# Altium PCB LeftyBase.PcbDoc
Units mm, origin at the board's own origin, x right, y up, seen from the top; angles counter-clockwise.
Board outline 79.4 x 68 mm, 4 copper layers (Top Layer, Plane 1, Plane 2, Bottom Layer), stack 1.579 mm thick; 95 components, 41 nets, 267 pads, 182 vias.
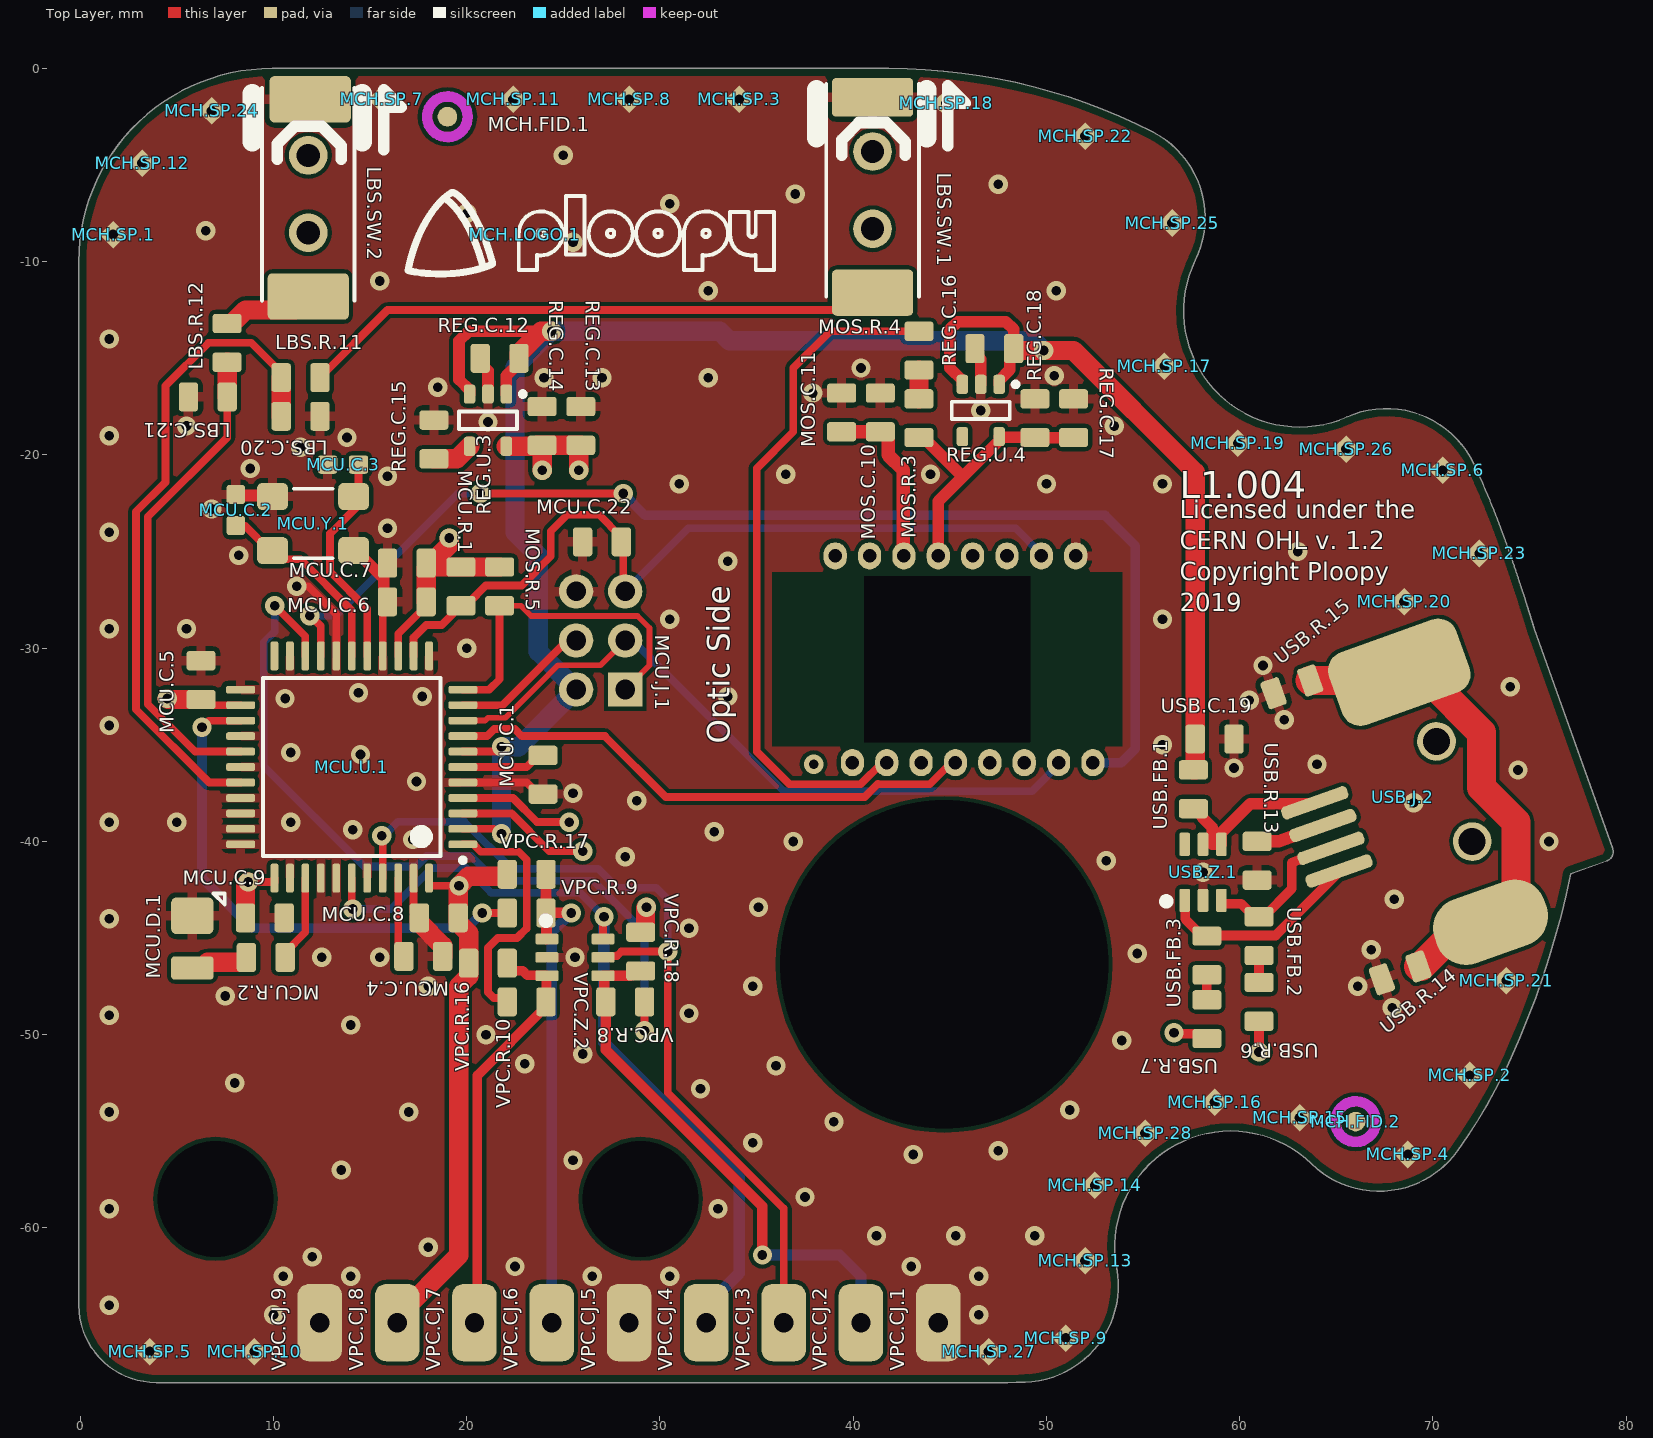
[diagram p0: Top Layer view]
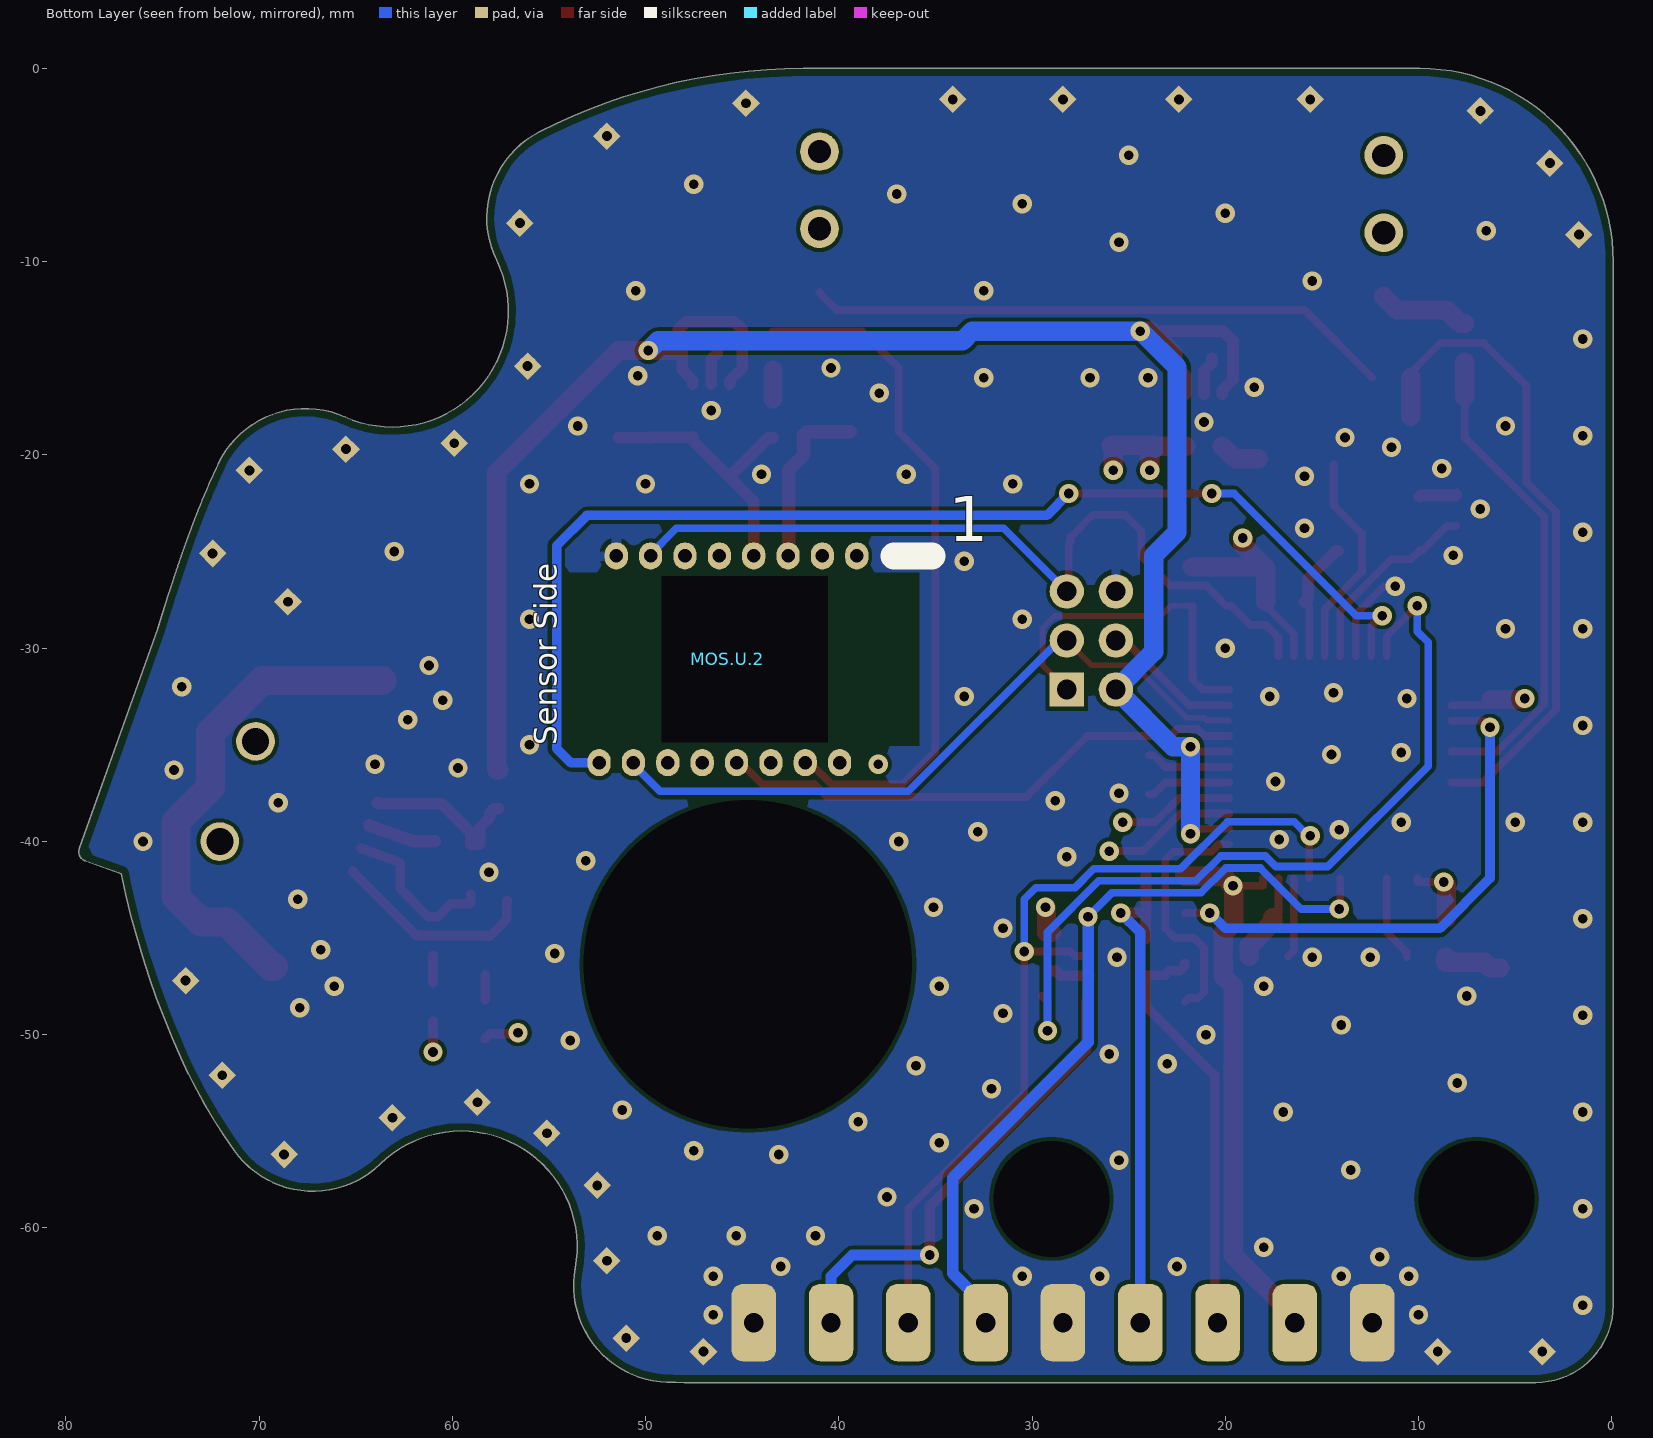
[diagram p1: Bottom Layer view, seen from below]
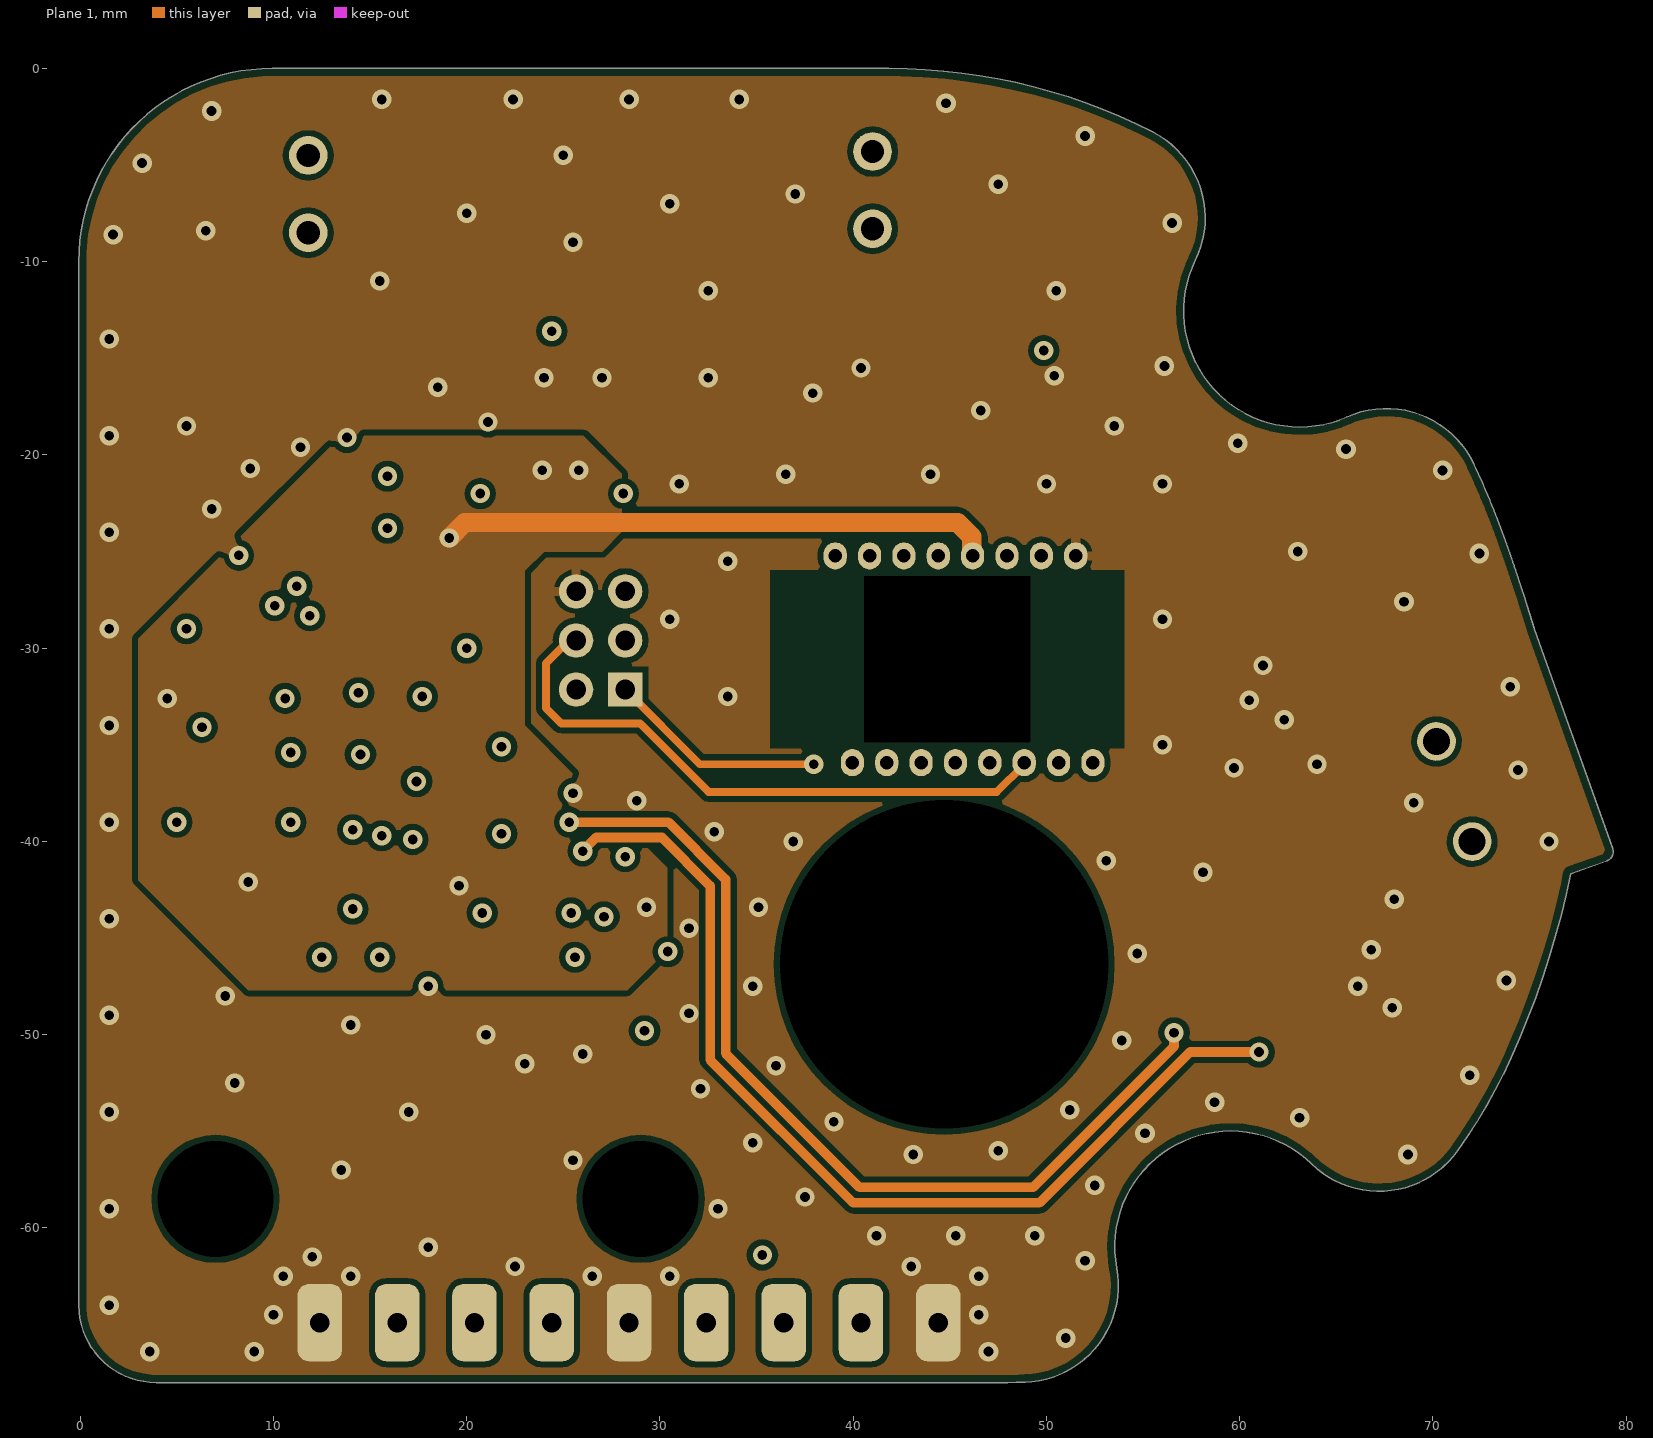
[diagram p2: Plane 1]
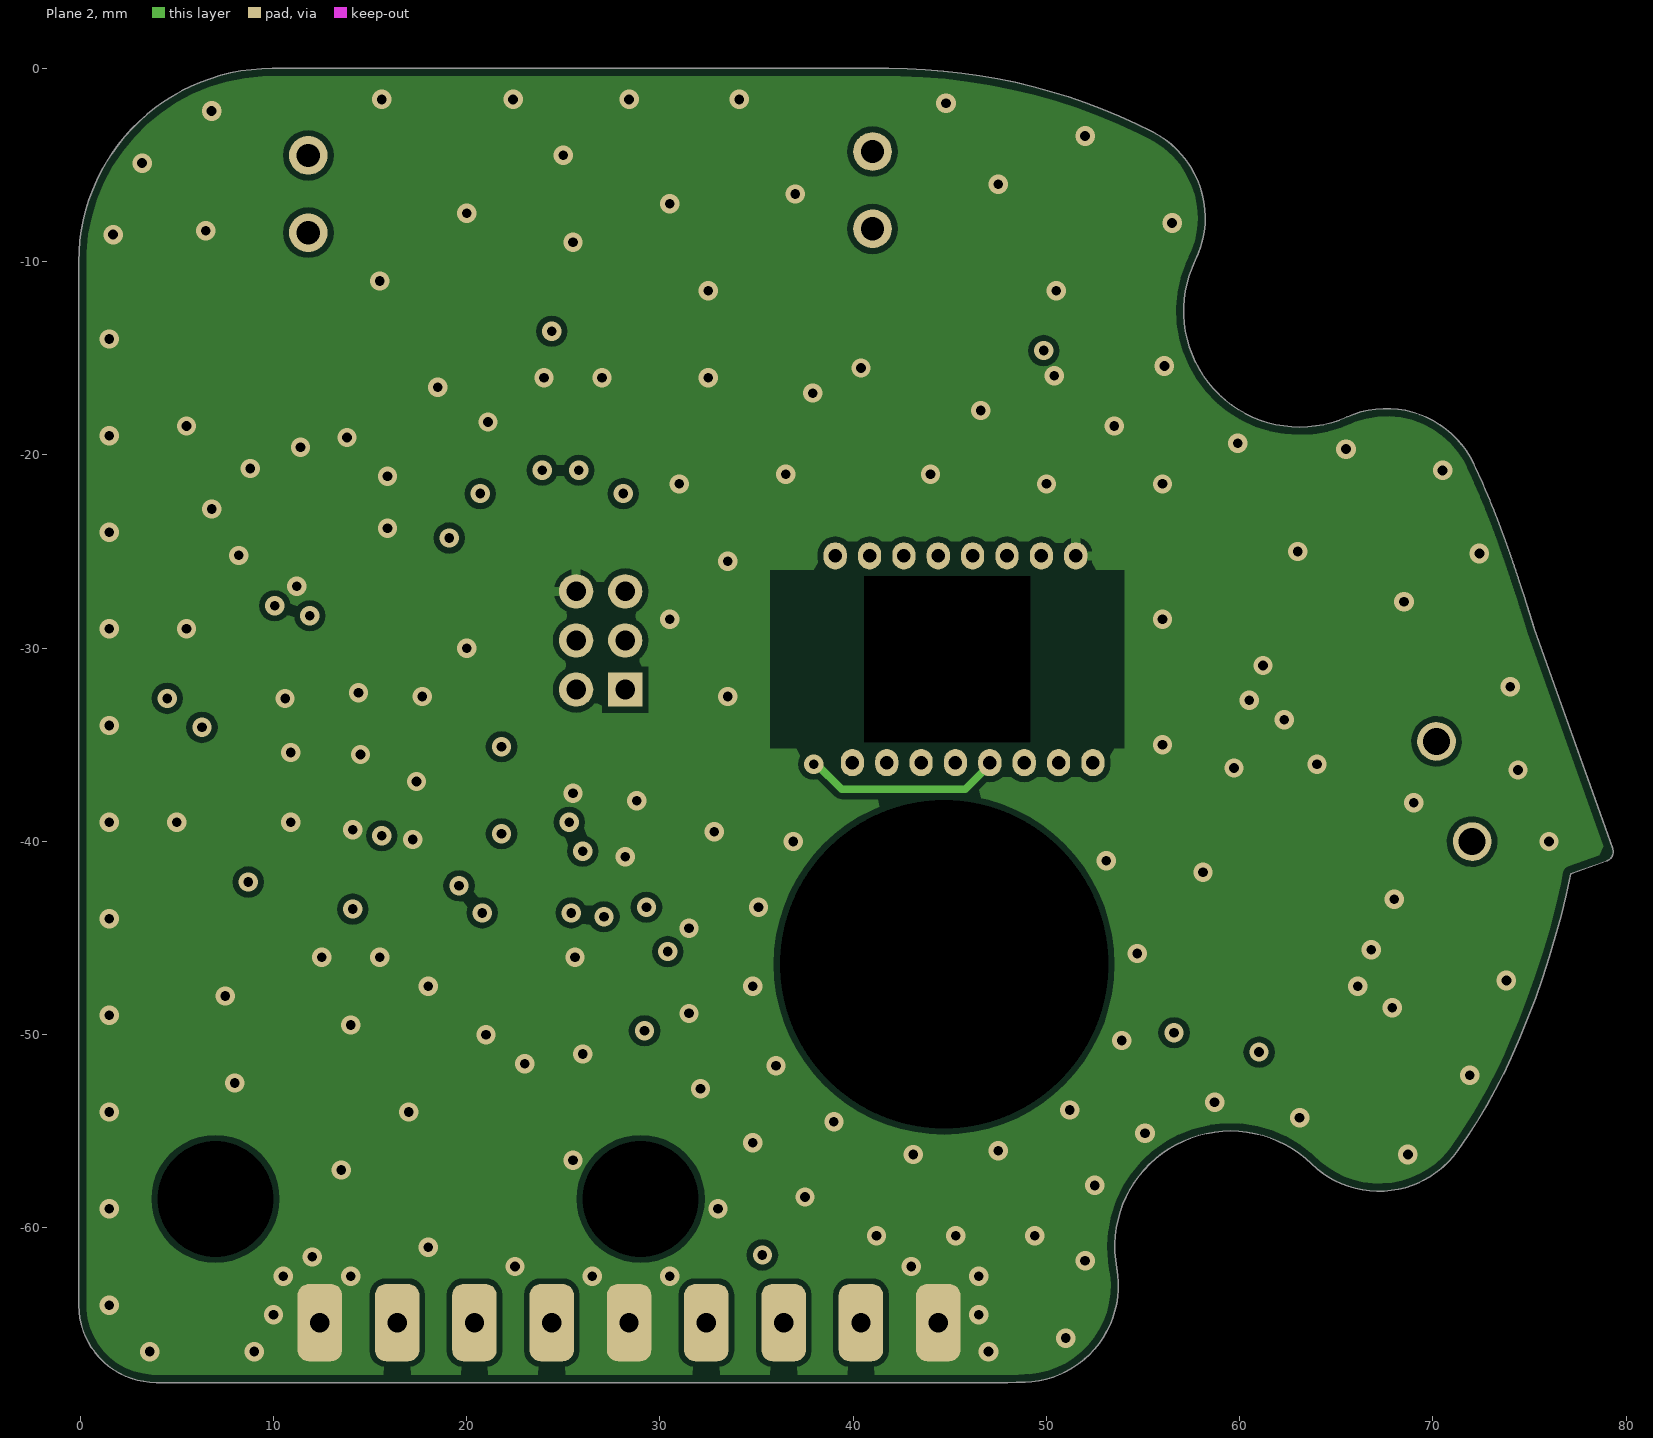
[diagram p3: Plane 2]

## Layer stack, top to bottom
Top Mask: solder mask 0.01, Solder Resist, Dk 3.5
Top Layer: signal copper 0.0356
Dielectric 1: prepreg 0.127, FR-4, Dk 4.2
Plane 1: signal copper 0.036
Dielectric 4: core 1.182, Dk 4.2
Plane 2: signal copper 0.036
Dielectric 2: prepreg 0.127, Dk 4.2
Bottom Layer: signal copper 0.0356
Bottom Solder: solder mask 0.01, Solder Resist, Dk 3.5

## Board outline
365 vertices, not listed, extent -0.073,-68 79.324,0

## Design rules (kind name [scope] priority, off if disabled: settings)
BoardOutlineClearance [(Not HasFootprint('SPARKGAP'))] p1: gap=0.4 ignorepadtopadclearanceinfootprint=FALSE
Clearance "HighV Pads" [(InNetClass('HighV') AND (IsPad OR IsVia)) vs IsPad OR IsVia] p1: gap=0.4 ignorepadtopadclearanceinfootprint=FALSE except(0: Arc-Hole Track-Hole SMDPad-Hole THPad-Hole Via-Hole Fill-Hole Poly-Hole Region-Hole Text-Hole) // Establishes minimum clearance between bare pads that are high voltage, per IPC2221A Table 6-1, 51-100V, condition A6
Clearance Inter-Pad [IsPad vs IsPad] p2: gap=0.2 ignorepadtopadclearanceinfootprint=FALSE except(0: Arc-Hole Track-Hole SMDPad-Hole THPad-Hole Via-Hole Fill-Hole Poly-Hole Region-Hole Text-Hole)
Clearance "Spark Gaps" [InNetClass('Spark Gap') vs InNet('GND') And InPoly] p3: gap=0.635 ignorepadtopadclearanceinfootprint=FALSE except(0: Arc-Hole Track-Hole SMDPad-Hole THPad-Hole Via-Hole Fill-Hole Poly-Hole Region-Hole Text-Hole)
Clearance FIDs [Name like 'FID*'] p4: gap=1.016 ignorepadtopadclearanceinfootprint=FALSE except(0: Arc-Hole Track-Hole SMDPad-Hole THPad-Hole Via-Hole Fill-Hole Poly-Hole Region-Hole Text-Hole)
Clearance "Inner Planes" [InPoly AND OnMid] p5: gap=0.3 ignorepadtopadclearanceinfootprint=FALSE except(0: Arc-Hole Track-Hole SMDPad-Hole THPad-Hole Via-Hole Fill-Hole Poly-Hole Region-Hole Text-Hole) // Defines a larger clearance for planes on inner layers.
Clearance "All Planes" [InPoly] p6: gap=0.2 ignorepadtopadclearanceinfootprint=FALSE except(0: Arc-Hole Track-Hole SMDPad-Hole THPad-Hole Via-Hole Fill-Hole Poly-Hole Region-Hole Text-Hole) // Defines minimum clearance between planes on the same layer.
Clearance "Inner Layer Clearance" [OnMid vs OnMid] p7: gap=0.3 ignorepadtopadclearanceinfootprint=FALSE except(0: Arc-Hole Track-Hole SMDPad-Hole THPad-Hole Via-Hole Fill-Hole Poly-Hole Region-Hole Text-Hole) // We will give inner layers more spacing because they tend to be subject to stricter process limits.
Clearance [All] p8: gap=0.22 ignorepadtopadclearanceinfootprint=FALSE except(0: Arc-Hole Track-Hole SMDPad-Hole THPad-Hole Via-Hole Fill-Hole Poly-Hole Region-Hole Text-Hole) // 2 oz (70um) boards require at least 10mil spacing. We give a bit more to make sure things work well.
ComponentClearance "Terminal Block" [(HasFootprint('Phoenix 1933189 - Header')) vs (HasFootprint('Phoenix 1933189 - Header'))] p1: gap=-2.286 collisioncheckmode=3 verticalgap=0.254 showdistances=FALSE
ComponentClearance "FET/TP self Clearance" [(Name like 'Q*') Or (Name like 'TP*') vs (Name like 'Q*') Or (Name like 'TP*')] p2: gap=0.254 collisioncheckmode=3 verticalgap=0.254 showdistances=FALSE
ComponentClearance [Not ((Name like 'H*') Or (Name like 'FID*') Or (Name like 'SP*')) vs Not ((Name like 'H*') Or (Name like 'FID*') Or (Name like 'SP*'))] p3: gap=0.5 collisioncheckmode=3 verticalgap=0.5 showdistances=FALSE
DiffPairsRouting [All] p1: maxlimit=0.508 minlimit=0.279 mostfreqgap=0.381 toplayer_prefgap=0.279 toplayer_minwidth=0.279 toplayer_maxwidth=0.508 toplayer_prefwidth=0.381 midlayer2_mingap=0.305 midlayer2_minwidth=0.305 midlayer2_maxwidth=0.508 midlayer2_prefwidth=0.381 midlayer3_prefgap=0.279 midlayer3_minwidth=0.279 midlayer3_maxwidth=0.508 midlayer3_prefwidth=0.381 bottomlayer_prefgap=0.279 bottomlayer_minwidth=0.279 bottomlayer_maxwidth=0.508 bottomlayer_prefwidth=0.381 maxuncoupledlength=12.7
Height [All] p1: minheight=0 maxheight=41 prefheight=12.7
HoleSize [All] p1: absolutevalues=TRUE maxlimit=100 minlimit=0.3 maxpercent=80.000 minpercent=20.000
HoleToHoleClearance [All] p1: gap=0.6 allowstackedmicrovias=TRUE
LayerPairs [All] p1: enforce=FALSE
MinimumSolderMaskSliver [All] p1: minsoldermaskwidth=0.09
NetAntennae [Not (HasFootprint('BALANCE_RESISTOR'))] p1: netantennaetolerance=0
PasteMaskExpansion [All] p1: expansion=-0.025
PlaneClearance [All] p1: clearance=0.3
PlaneConnect [All] p1: pad.planeconnectstyle=Relief pad.reliefexpansion=0.5 pad.reliefentries=4 pad.reliefconductorwidth=0.5 pad.reliefairgap=0.25 via.planeconnectstyle=Direct via.reliefexpansion=0.5 via.reliefentries=4 via.reliefconductorwidth=0.5 via.reliefairgap=0.25
PolygonConnect "PolygonConnect Spark Gap" [HasFootprint('SparkGap')] p1: connectstyle=Direct reliefconductorwidth=0.254 reliefentries=4 polygonreliefangle="90 Angle" airgapwidth=0.254 // This rule makes it so spark gaps get direct connections to ground planes.
PolygonConnect PolygonConnect_GND [All vs InNet('GND')] p2: thpad.connectstyle=Relief thpad.reliefconductorwidth=0.5 thpad.reliefentries=4 thpad.polygonreliefangle="90 Angle" thpad.airgapwidth=0.25 smdpad.connectstyle=Relief smdpad.reliefconductorwidth=0.5 smdpad.reliefentries=4 smdpad.polygonreliefangle="90 Angle" smdpad.airgapwidth=0.25 via.connectstyle=Direct via.reliefconductorwidth=0.5 via.reliefentries=4 via.polygonreliefangle="90 Angle" via.airgapwidth=0.25 // This rule specifies all vias and holes connected to a GND plane have direct connections.
PolygonConnect [All] p3: thpad.connectstyle=Relief thpad.reliefconductorwidth=0.5 thpad.reliefentries=4 thpad.polygonreliefangle="90 Angle" thpad.airgapwidth=0.25 smdpad.connectstyle=Relief smdpad.reliefconductorwidth=0.5 smdpad.reliefentries=4 smdpad.polygonreliefangle="90 Angle" smdpad.airgapwidth=0.25 via.connectstyle=Direct via.reliefconductorwidth=0.5 via.reliefentries=4 via.polygonreliefangle="90 Angle" via.airgapwidth=0.25
RoutingVias [All] p1: holewidth=0.5 width=1 viastyle="Through Hole" minholewidth=0.2 minwidth=0.5 maxholewidth=5.08 maxwidth=6.35
ShortCircuit [Not (InPadClass('TraceResistorPads')) vs Not (InPadClass('TraceResistorPads'))] p1: allowed=FALSE
SilkToBoardRegionClearance [All] p1 off:
SilkToSilkClearance [All] p1 off: silktosilkclearance=0.254
SilkToSolderMaskClearance SilkscreenOverComponentPads [IsPad] p1: minsilkscreentomaskgap=0.102 clearancetoexposedcopper=FALSE
SolderMaskExpansion [All] p1: expansion=0.076
Width [All] p1: maxlimit=50.8 minlimit=0.26 preferedwidth=0.4 midlayer2_minwidth=0.35 midlayer3_minwidth=0.35 minimp=50.000000 maximp=50.000000 favimp=50.000000
15 further rules are at their usual default settings.

## Classes and differential pairs
component class VPC: VPC.CJ.1 VPC.CJ.2 VPC.CJ.3 VPC.CJ.4 VPC.CJ.5 VPC.CJ.6 VPC.CJ.7 VPC.CJ.8 VPC.CJ.9 VPC.R.8 VPC.R.9 VPC.R.10 VPC.R.16 VPC.R.17 VPC.R.18 VPC.Z.2
component class USB: USB.C.19 USB.FB.1 USB.FB.2 USB.FB.3 USB.J.2 USB.R.6 USB.R.7 USB.R.13 USB.R.14 USB.R.15 USB.Z.1
component class REG: REG.C.12 REG.C.13 REG.C.14 REG.C.15 REG.C.16 REG.C.17 REG.C.18 REG.U.3 REG.U.4
component class MOS: MOS.C.10 MOS.C.11 MOS.R.3 MOS.R.4 MOS.R.5 MOS.U.2
component class MCU: MCU.C.1 MCU.C.2 MCU.C.3 MCU.C.4 MCU.C.5 MCU.C.6 MCU.C.7 MCU.C.8 MCU.C.9 MCU.C.22 MCU.D.1 MCU.J.1 MCU.R.1 MCU.R.2 MCU.U.1 MCU.Y.1
component class LBS: LBS.C.20 LBS.C.21 LBS.R.11 LBS.R.12 LBS.SW.1 LBS.SW.2
component class MCH: MCH.FID.1 MCH.FID.2 MCH.LOGO.1 MCH.SP.1 MCH.SP.2 MCH.SP.3 MCH.SP.4 MCH.SP.5 MCH.SP.6 MCH.SP.7 MCH.SP.8 MCH.SP.9 MCH.SP.10 MCH.SP.11 MCH.SP.12 MCH.SP.13 MCH.SP.14 MCH.SP.15 MCH.SP.16 MCH.SP.17 MCH.SP.18 MCH.SP.19 MCH.SP.20 MCH.SP.21 MCH.SP.22 MCH.SP.23 MCH.SP.24 MCH.SP.25 MCH.SP.26 MCH.SP.27 MCH.SP.28

## Components (designator, comment, footprint, x,y, rotation, side; value= is the part's Value field where it differs from the comment)
LBS.C.20 "0805" 0805 11.4,-18 r270 top value="0.01uF 100V" (schematic designator C20)
LBS.C.21 "0805" 0805 6.6,-17 r90 top value="0.01uF 100V" (schematic designator C21)
LBS.R.11 "0805" 0805 11.4,-16 r270 top value="1k 1%" (schematic designator R11)
LBS.R.12 "0805" 0805 7.6,-14.2 r0 top value="1k 1%" (schematic designator R12)
LBS.SW.1 "D2LS-21" D2LS-21#1 41,-6.3 r270 top (schematic designator SW1)
LBS.SW.2 "D2LS-21" D2LS-21#2 11.8,-6.5 r270 top (schematic designator SW2)
MCH.FID.1 "IPC-7351 Fiducial 1mm" FIDUCIAL_1.5 19,-2.5 r90 top (schematic designator FID1)
MCH.FID.2 "IPC-7351 Fiducial 1mm" FIDUCIAL_1.5 66,-54.5 r0 top (schematic designator FID2)
MCH.LOGO.1 "Ploopy logo, silkscreen" PloopyLogo 23,-8.6 r0 top (schematic designator LOGO1)
MCH.SP.1 "Spark Gap" SparkGap 1.7,-8.6 r90 top (schematic designator SP1)
MCH.SP.2 "Spark Gap" SparkGap 71.9,-52.1 r90 top (schematic designator SP2)
MCH.SP.3 "Spark Gap" SparkGap 34.1,-1.6 r90 top (schematic designator SP3)
MCH.SP.4 "Spark Gap" SparkGap 68.7,-56.2 r90 top (schematic designator SP4)
MCH.SP.5 "Spark Gap" SparkGap 3.6,-66.4 r90 top (schematic designator SP5)
MCH.SP.6 "Spark Gap" SparkGap 70.5,-20.8 r90 top (schematic designator SP6)
MCH.SP.7 "Spark Gap" SparkGap 15.6,-1.6 r90 top (schematic designator SP7)
MCH.SP.8 "Spark Gap" SparkGap 28.4,-1.6 r90 top (schematic designator SP8)
MCH.SP.9 "Spark Gap" SparkGap 51,-65.7 r90 top (schematic designator SP9)
MCH.SP.10 "Spark Gap" SparkGap 9,-66.4 r90 top (schematic designator SP10)
MCH.SP.11 "Spark Gap" SparkGap 22.4,-1.6 r90 top (schematic designator SP11)
MCH.SP.12 "Spark Gap" SparkGap 3.2,-4.9 r90 top (schematic designator SP12)
MCH.SP.13 "Spark Gap" SparkGap 52,-61.7 r90 top (schematic designator SP13)
MCH.SP.14 "Spark Gap" SparkGap 52.5,-57.8 r90 top (schematic designator SP14)
MCH.SP.15 "Spark Gap" SparkGap 63.1,-54.3 r90 top (schematic designator SP15)
MCH.SP.16 "Spark Gap" SparkGap 58.7,-53.5 r90 top (schematic designator SP16)
MCH.SP.17 "Spark Gap" SparkGap 56.1,-15.4 r90 top (schematic designator SP17)
MCH.SP.18 "Spark Gap" SparkGap 44.8,-1.8 r90 top (schematic designator SP18)
MCH.SP.19 "Spark Gap" SparkGap 59.9,-19.4 r90 top (schematic designator SP19)
MCH.SP.20 "Spark Gap" SparkGap 68.5,-27.6 r90 top (schematic designator SP20)
MCH.SP.21 "Spark Gap" SparkGap 73.8,-47.2 r90 top (schematic designator SP21)
MCH.SP.22 "Spark Gap" SparkGap 52,-3.5 r90 top (schematic designator SP22)
MCH.SP.23 "Spark Gap" SparkGap 72.4,-25.1 r90 top (schematic designator SP23)
MCH.SP.24 "Spark Gap" SparkGap 6.8,-2.2 r90 top (schematic designator SP24)
MCH.SP.25 "Spark Gap" SparkGap 56.5,-8 r90 top (schematic designator SP25)
MCH.SP.26 "Spark Gap" SparkGap 65.5,-19.7 r90 top (schematic designator SP26)
MCH.SP.27 "Spark Gap" SparkGap 47,-66.4 r90 top (schematic designator SP27)
MCH.SP.28 "Spark Gap" SparkGap 55.1,-55.1 r90 top (schematic designator SP28)
MCU.C.1 "0805" 0805 23.95,-36.55 r180 top value="1uF 25V" (schematic designator C1)
MCU.C.2 "0603" 0603 8.05,-22.85 r180 top value="18pF 50V" (schematic designator C2)
MCU.C.3 "0603" 0603 13.6,-20.5 r270 top value="18pF 50V" (schematic designator C3)
MCU.C.4 "0805" 0805 17.75,-45.95 r270 top value="0.1uF 100V" (schematic designator C4)
MCU.C.5 "0805" 0805 6.25,-31.65 r0 top value="0.1uF 100V" (schematic designator C5)
MCU.C.6 "0805" 0805 16.9,-27.6 r90 top value="0.1uF 100V" (schematic designator C6)
MCU.C.7 "0805" 0805 16.9,-25.6 r90 top value="10uF 25V" (schematic designator C7)
MCU.C.8 "0805" 0805 18.55,-43.95 r90 top value="0.1uF 100V" (schematic designator C8)
MCU.C.9 "0805" 0805 9.55,-43.95 r270 top value="0.1uF 100V" (schematic designator C9)
MCU.C.22 "0805" 0805 27,-24.5 r90 top value="0.1uF 100V" (schematic designator C22)
MCU.D.1 "SPMWH1228" SPMWH1228 5.8,-45 r90 top (schematic designator D1)
MCU.J.1 "Atmel_ICSP" 6x2 28.2,-32.14 r180 top (schematic designator J1)
MCU.R.1 "0805" 0805 19.7,-26.8 r180 top value="10k 1%" (schematic designator R1)
MCU.R.2 "0805" 0805 9.6,-46 r90 top value="1k 1%" (schematic designator R2)
MCU.U.1 "ATMEGA32U4RC-AU" "ATmega32U4 - TQFP80P1200X1200X120-44N" 14.05,-36.15 r180 top (schematic designator U1)
MCU.Y.1 "LFXTAL055663BULK" LFXTAL055663BULK 12.05,-23.55 r180 top (schematic designator Y1)
MOS.C.10 "0805" 0805 41.4,-17.8 r0 top value="10uF 25V" (schematic designator C10)
MOS.C.11 "0805" 0805 39.4,-17.8 r0 top value="0.1uF 100V" (schematic designator C11)
MOS.R.3 "0805" 0805 43.4,-18.1 r0 top value="22R 1%" (schematic designator R3)
MOS.R.4 "0805" 0805 43.4,-14.6 r0 top value="22R 1%" (schematic designator R4)
MOS.R.5 "0805" 0805 21.7,-26.8 r180 top value="10k 1%" (schematic designator R5)
MOS.U.2 "PMW3360DM-T2QU" PMW3360DM-T2QU 39.067,-25.225 r180 bottom locked (schematic designator U2)
REG.C.12 "0805" 0805 21.7,-15 r90 top value="1uF 25V" (schematic designator C12)
REG.C.13 "0805" 0805 25.9,-18.5 r0 top value="10uF 25V" (schematic designator C13)
REG.C.14 "0805" 0805 23.9,-18.5 r0 top value="1uF 25V" (schematic designator C14)
REG.C.15 "0805" 0805 18.3,-19.2 r0 top value="100pF 100V" (schematic designator C15)
REG.C.16 "0805" 0805 47.3,-14.5 r90 top locked value="1uF 25V" (schematic designator C16)
REG.C.17 "0805" 0805 51.4,-18.1 r0 top value="10uF 25V" (schematic designator C17)
REG.C.18 "0805" 0805 49.4,-18.1 r0 top value="1uF 25V" (schematic designator C18)
REG.U.3 "AP2202K-3.3" "AP2202 - SOT95P270X145-5N" 21.1,-18.2 r270 top (schematic designator U3)
REG.U.4 "AP2204K-1.8" "AP2202 - SOT95P270X145-5N" 46.6,-17.7 r270 top (schematic designator U4)
USB.C.19 "0805" 0805 58.7,-34.7 r270 top value="10uF 25V" (schematic designator C19)
USB.FB.1 "ACML-0805-601-T" 0805 57.6,-37.3 r180 top (schematic designator FB1)
USB.FB.2 "ACML-0805-601-T" 0805 61,-44.9 r0 top (schematic designator FB2)
USB.FB.3 "ACML-0805-601-T" 0805 58.3,-45.9 r0 top (schematic designator FB3)
USB.J.2 "1734346-4" 1734346-4 71.575,-37.25 r19.6 top (schematic designator J2)
USB.R.6 "0805" 0805 61,-48.3 r0 top value="22R 1%" (schematic designator R6)
USB.R.7 "0805" 0805 58.3,-49.2 r0 top value="22R 1%" (schematic designator R7)
USB.R.13 "0805" 0805 60.9,-41 r180 top value=0R (schematic designator R13)
USB.R.14 "0805" 0805 68.3,-46.8 r109.3 top value=0R (schematic designator R14)
USB.R.15 "0805" 0805 62.7,-32 r109.3 top value=0R (schematic designator R15)
USB.Z.1 "IP4220CZ6,125" "PESD3V3S4UD - SOT95P275X110-6N" 58.1,-41.6 r90 top (schematic designator Z1)
VPC.CJ.1 "PCBJointCastellationJoint" PCBJoint 44.4,-64.9 r0 top (schematic designator CJ1)
VPC.CJ.2 "PCBJointCastellationJoint" PCBJoint 40.4,-64.9 r0 top (schematic designator CJ2)
VPC.CJ.3 "PCBJointCastellationJoint" PCBJoint 36.4,-64.9 r0 top (schematic designator CJ3)
VPC.CJ.4 "PCBJointCastellationJoint" PCBJoint 32.4,-64.9 r0 top (schematic designator CJ4)
VPC.CJ.5 "PCBJointCastellationJoint" PCBJoint 28.4,-64.9 r0 top (schematic designator CJ5)
VPC.CJ.6 "PCBJointCastellationJoint" PCBJoint 24.4,-64.9 r0 top (schematic designator CJ6)
VPC.CJ.7 "PCBJointCastellationJoint" PCBJoint 20.4,-64.9 r0 top (schematic designator CJ7)
VPC.CJ.8 "PCBJointCastellationJoint" PCBJoint 16.4,-64.9 r0 top (schematic designator CJ8)
VPC.CJ.9 "PCBJointCastellationJoint" PCBJoint 12.4,-64.9 r0 top (schematic designator CJ9)
VPC.R.8 "0805" 0805 28.2,-48.3 r90 top value="10k 1%" (schematic designator R8)
VPC.R.9 "0805" 0805 23.1,-43.7 r270 top value="10k 1%" (schematic designator R9)
VPC.R.10 "0805" 0805 23.1,-48.3 r270 top value="10k 1%" (schematic designator R10)
VPC.R.16 "0805" 0805 21.1,-46.3 r270 top value="1k 1%" (schematic designator R16)
VPC.R.17 "0805" 0805 23.1,-41.7 r270 top value="1k 1%" (schematic designator R17)
VPC.R.18 "0805" 0805 29,-45.7 r180 top value="1k 1%" (schematic designator R18)
VPC.Z.2 "IP4220CZ6,125" "PESD3V3S4UD - SOT95P275X110-6N" 25.6,-46 r0 top (schematic designator Z2)

## Footprints (in the part's own frame and the unit in brackets; to place one, negate y for a bottom-side part, rotate by r counter-clockwise, add the part's x,y. Pads: shape width x height; smd on the part's side, far side on the other; paste and mask are expansions set on the pad)
6x2 [mil]
  rect 70x70 hole 40 paste-3897.64: 1(0,0)
  round 70 hole 40 paste-3897.64: 2(100,0) 3(0,-100) 4(100,-100) 5(0,-200) 6(100,-200)
  body extent -50,-250 150,50, height 330
0603 [mm] "Chip Capacitor, 2-Leads, Body 1.6x0.8mm, IPC Medium Density"
  rrect30% 0.95x1 smd paste-2.515: 1(0,-0.8) 2(0,0.8)
  body extent -0.48,-0.88 0.48,0.87, height 0.65
0805 [mm] "Chip Capacitor, 2-Leads, Body 2.0x1.3mm, IPC Medium Density"
  rrect30% 1.5x1 smd paste-2.515: 1(0,1.002) 2(0,-1.002)
  body extent -0.72,-1.1 0.72,1.1, height 0.8
1734346-4 [mm]
  rrect70% 3.6x0.7 smd paste-0.08 mask+0.092: 1(-7.5,1.875) 2(-7.5,-0.625) 3(-7.5,-1.875) 4(-7.5,0.625)
  rrect50% 7x4 smd paste-0.4: 5(-1.11,6.77)
  rrect90% 6x3.5 smd paste-0.4: 5(-1,-7)
  round 2 hole 1.4 paste-99: ""(-0.5,2.75) ""(-0.5,-2.75)
  body extent -8.6,-8.25 8.5,8.25, height 11.31
"AP2202 - SOT95P270X145-5N" [mm] "SOT23, 5-Leads, Body 2.92x2.70mm, Pitch 0.95mm, IPC Medium Density"
  rrect50% 1x0.6 smd paste-0.025: 1(-1.35,0.95) 2(-1.35,0) 3(-1.35,-0.95) 4(1.35,-0.95) 5(1.35,0.95)
  silkscreen extent -1.47,-1.5 0.45,1.93, body extent -0.85,-1.52 0.85,1.52, height 1.45
"ATmega32U4 - TQFP80P1200X1200X120-44N" [mm] "TQFP, 44-Leads, Body 10.00x10.00mm, Pitch 0.80mm, IPC Medium Density"
  rrect50% 1.5x0.4 smd paste-0.05: 1(-5.75,4) 2(-5.75,3.2) 3(-5.75,2.4) 4(-5.75,1.6) 5(-5.75,0.8) 6(-5.75,0) 7(-5.75,-0.8) 8(-5.75,-1.6) 9(-5.75,-2.4) 10(-5.75,-3.2) 11(-5.75,-4) 23(5.75,-4) 24(5.75,-3.2) 25(5.75,-2.4) 26(5.75,-1.6) 27(5.75,-0.8) 28(5.75,0) 29(5.75,0.8) 30(5.75,1.6) 31(5.75,2.4) 32(5.75,3.2) 33(5.75,4)
  rrect50% 0.4x1.5 smd paste-0.05: 12(-4,-5.75) 13(-3.2,-5.75) 14(-2.4,-5.75) 15(-1.6,-5.75) 16(-0.8,-5.75) 17(0,-5.75) 18(0.8,-5.75) 19(1.6,-5.75) 20(2.4,-5.75) 21(3.2,-5.75) 22(4,-5.75) 34(4,5.75) 35(3.2,5.75) 36(2.4,5.75) 37(1.6,5.75) 38(0.8,5.75) 39(0,5.75) 40(-0.8,5.75) 41(-1.6,5.75) 42(-2.4,5.75) 43(-3.2,5.75) 44(-4,5.75)
  silkscreen extent -5.88,-4.6 4.6,4.95, body extent -5,-5 5,5, height 1.2
D2LS-21#1 [mm]
  rrect20% 2x4.2 smd paste-0.03: A(-4.8,0)
  rrect20% 2.4x4.2 smd paste-0.03: B(5.3,0)
  round 2 hole 1.2: ""(-2,0) ""(2,0)
  silkscreen extent -5.5,-2.9 5.5,4.8, body extent -5.6,-2.4 5.6,2.4, height 3.19
D2LS-21#2 [mm]
  rrect20% 2.4x4.2 smd paste-0.03: A(-4.9,0.1) B(5.3,0)
  round 2 hole 1.2: ""(-2,0) ""(2,0)
  silkscreen extent -5.5,-2.9 5.5,4.8, body extent -5.6,-2.4 5.6,2.4, height 3.19
FIDUCIAL_1.5 [mil]
  round 40 smd paste-60 mask+30: 1(0,0)
  Top Layer keep-out circle w21.65: c0,0 r41.34
LFXTAL055663BULK [mm]
  rrect40% 1.6x1.4 smd paste-0.05: 1(-2.1,-1.4) 2(2.1,-1.4) 3(2.1,1.4) 4(-2.1,1.4)
  silkscreen extent -1,-1.8 1,1.8, body extent -2.5,-1.6 2.5,1.6, height 1
PCBJoint [mm]
  rrect50% 2.3x4 hole 1 paste-99: 1(0,0)
"PESD3V3S4UD - SOT95P275X110-6N" [mm] "SOT23, 6-Leads, Body 2.90x2.75mm, Pitch 0.95mm, IPC Medium Density"
  rrect30% 1.2x0.55 smd paste-0.026 mask+0.085: 1(-1.45,0.95) 2(-1.45,0) 3(-1.45,-0.95) 4(1.45,-0.95) 5(1.45,0) 6(1.45,0.95)
  silkscreen extent -1.62,1.77 -1.38,2.02, body extent -0.85,-1.55 0.85,1.55, height 1.1
PloopyLogo [mm]
  silkscreen extent -6.04,-2.03 12.9,2.2
PMW3360DM-T2QU [mm]
  oval 1.2x1.4 hole 0.7: 1(0,0) 2(-1.778,0) 3(-3.556,0) 4(-5.334,0) 5(-7.112,0) 6(-8.89,0) 7(-10.668,0) 8(-12.446,0) 9(-13.335,-10.7) 10(-11.557,-10.7) 11(-9.779,-10.7) 12(-8.001,-10.7) 13(-6.223,-10.7) 14(-4.445,-10.7) 15(-2.667,-10.7) 16(-0.889,-10.7)
  rect 0x0 hole 8.6 square unplated: ""(-5.8,-5.35)
  silkscreen extent 1.92,0 3.9,0, body extent -16.06,-14.76 5.09,4.09, height 2.44
SparkGap [mil]
  rect 40x40 smd rot 45 paste-99 mask+4: 1(0,0)
  rect 40x40 smd far side rot 45 paste-99 mask+4: 1(0,0)
SPMWH1228 [mm]
  rrect30% 1.2x2.2 smd paste-0.05 mask+0.02: 1(-1.55,0)
  rrect30% 1.9x2.2 smd paste-0.05 mask+0.02: 2(1.15,0)
  silkscreen extent 1.72,-1.67 2.3,-1.1, body extent -1.75,-1.4 1.75,1.4, height 0.65

## Part data
LBS.C.20 LBS.C.21: library part "Cap 0.01uF 100V", "0805, X5R or better", Supplier Part Number 1=1276-6845-2-ND, PNP-A=0, PNP-da=0, PNP-dx=0, PNP-dy=0, PNP-FeedType=Tape, PNP-Level=1, PNP-Lv=1, PNP-Nzl=2, PNP-PlacePriority=1, PNP-Pt=0, PNP-TapeIndex=1, PNP-TapeWidth=8, PNP-Thk=0.85, PNP-TS=70, PNP-Type=chi, PNP-Voff=0, PNP-W=0, PNP-X=2.00, PNP-Y=1.25, Supplier 1=Digi-Key, Supplier 2=Arrow, Supplier Part Number 2=HFLC7Kmwq4-6R2SVzaQAUvCwxvZH1YjWdj_EBba1ByE
LBS.R.11 LBS.R.12 MCU.R.2 VPC.R.16 VPC.R.17 VPC.R.18: library part "Res 1k 1% 0805", "Chip resistor, 1/8W 100PPM", Supplier Part Number 1=RMCF0805FT1K00TR-ND, PNP-A=0, PNP-da=0, PNP-dx=0, PNP-dy=0, PNP-FeedType=Tape, PNP-Level=1, PNP-Lv=1, PNP-Nzl=2, PNP-PlacePriority=1, PNP-Pt=0, PNP-TapeIndex=1, PNP-TapeWidth=8, PNP-Thk=0.55, PNP-TS=70, PNP-Type=chi, PNP-Voff=0, PNP-W=0, PNP-X=2.00, PNP-Y=1.25, Supplier 1=Digi-Key
LBS.SW.1 LBS.SW.2: "Compact Surface-mounting Switch for long durability", Supplier Part Number 1=Z4378CT-ND, Supplier 1=Digi-Key, Supplier 2=Mouser, Supplier Part Number 2=653-D2LS-21
MCH.FID.1 MCH.FID.2: library part FIDUCIAL_1.5, PNP-A=1, PNP-da=0, PNP-dx=0, PNP-dy=0, PNP-FeedType=Fiducial, PNP-Level=1, PNP-Lv=1, PNP-Nzl=2, PNP-PlacePriority=0, PNP-Pt=0, PNP-TapeIndex=0, PNP-TapeWidth=0, PNP-Thk=1.02, PNP-TS=70, PNP-Type=MARK1, PNP-Voff=0, PNP-W=0, PNP-X=4, PNP-Y=4
MCH.LOGO.1: library part PloopyLogo, PNP-A=0, PNP-da=0, PNP-dx=0, PNP-dy=0, PNP-FeedType=Tape, PNP-Level=1, PNP-Lv=1, PNP-Nzl=2, PNP-PlacePriority=1, PNP-Pt=0, PNP-TapeIndex=1, PNP-TapeWidth=8, PNP-Thk=1, PNP-TS=70, PNP-Type=CHI, PNP-Voff=0, PNP-W=0, PNP-X=1, PNP-Y=1
MCH.SP.1 MCH.SP.2 MCH.SP.3 MCH.SP.4 MCH.SP.5 MCH.SP.6 MCH.SP.7 MCH.SP.8 MCH.SP.9 MCH.SP.10 MCH.SP.11 MCH.SP.12 MCH.SP.13 MCH.SP.14 MCH.SP.15 MCH.SP.16 MCH.SP.17 MCH.SP.18 MCH.SP.19 MCH.SP.20 MCH.SP.21 MCH.SP.22 MCH.SP.23 MCH.SP.24 MCH.SP.25 MCH.SP.26 MCH.SP.27 MCH.SP.28: "Open square pad for spark gapping", PNP-A=0, PNP-da=0, PNP-dx=0, PNP-dy=0, PNP-FeedType=Tape, PNP-Level=1, PNP-Lv=1, PNP-Nzl=2, PNP-PlacePriority=1, PNP-Pt=0, PNP-TapeIndex=1, PNP-TapeWidth=8, PNP-Thk=1, PNP-TS=70, PNP-Type=CHI, PNP-Voff=0, PNP-W=0, PNP-X=1, PNP-Y=1
MCU.C.1 REG.C.12 REG.C.14 REG.C.16 REG.C.18: library part "Cap 1uF 25V", "0805, X5R or better", Supplier Part Number 1=1276-1066-2-ND, PNP-A=0, PNP-da=0, PNP-dx=0, PNP-dy=0, PNP-FeedType=Tape, PNP-Level=1, PNP-Lv=1, PNP-Nzl=2, PNP-PlacePriority=1, PNP-Pt=0, PNP-TapeIndex=1, PNP-TapeWidth=8, PNP-Thk=1.25, PNP-TS=70, PNP-Type=chi, PNP-Voff=0, PNP-W=0, PNP-X=2.00, PNP-Y=1.25, Supplier 1=Digi-Key, Supplier 2=Digi-Key, Supplier Part Number 2=1276-1066-1-ND
MCU.C.2 MCU.C.3: library part "Cap 18pF 50V", "0603, C0G or better", Supplier Part Number 1=1292-1494-1-ND, PNP-A=0, PNP-da=0, PNP-dx=0, PNP-dy=0, PNP-FeedType=Tape, PNP-Level=1, PNP-Lv=1, PNP-Nzl=2, PNP-PlacePriority=1, PNP-Pt=0, PNP-TapeIndex=1, PNP-TapeWidth=8, PNP-Thk=0.60, PNP-TS=70, PNP-Type=chi, PNP-Voff=0, PNP-W=0, PNP-X=2.00, PNP-Y=1.25, Supplier 1=Digi-Key
MCU.C.4 MCU.C.5 MCU.C.6 MCU.C.8 MCU.C.9 MCU.C.22 MOS.C.11: library part "Cap 0.1uF 100V", "0805, X5R or better", Supplier Part Number 1=1276-6840-2-ND, PNP-A=0, PNP-da=0, PNP-dx=0, PNP-dy=0, PNP-FeedType=Tape, PNP-Level=1, PNP-Lv=1, PNP-Nzl=2, PNP-PlacePriority=1, PNP-Pt=0, PNP-TapeIndex=1, PNP-TapeWidth=8, PNP-Thk=1.05, PNP-TS=70, PNP-Type=chi, PNP-Voff=0, PNP-W=0, PNP-X=2.00, PNP-Y=1.25, Supplier 1=Digi-Key
MCU.C.7 MOS.C.10 REG.C.13 REG.C.17 USB.C.19: library part "Cap 10uF 25V", "0805, X5R or better", Supplier Part Number 1=81-GRM21BR61E106KA3L, PNP-A=0, PNP-da=0, PNP-dx=0, PNP-dy=0, PNP-FeedType=Tape, PNP-Level=1, PNP-Lv=1, PNP-Nzl=2, PNP-PlacePriority=1, PNP-Pt=0, PNP-TapeIndex=1, PNP-TapeWidth=8, PNP-Thk=1.25, PNP-TS=70, PNP-Type=chi, PNP-Voff=0, PNP-W=0, PNP-X=2.00, PNP-Y=1.25, Supplier 1=Mouser, Supplier 2=Digi-Key, Supplier Part Number 2=490-5523-1-ND
MCU.D.1: "3V/0.5W white LED, 2.8mm x 3.5mm", PNP-A=90, PNP-da=550, PNP-dx=0, PNP-dy=0, PNP-FeedType=Tape, PNP-Level=1, PNP-Lv=1, PNP-Nzl=3, PNP-PlacePriority=2, PNP-Pt=0, PNP-TapeIndex=1, PNP-TapeWidth=8, PNP-Thk=0.65, PNP-TS=70, PNP-Type=chi, PNP-Voff=0, PNP-W=0, PNP-X=2.8, PNP-Y=3.2, Supplier 1=Arrow, Supplier 2=Digi-Key, Supplier 3=Digi-Key, Supplier Part Number 2=1510-1428-1-ND, Supplier Part Number 3=1510-1429-1-ND
MCU.J.1: "6-pin 0.100\" ICSP header", Supplier Part Number 1=S2012EC-03-ND, PNP-da=0, Supplier 1=Digi-Key
MCU.R.1 MOS.R.5 VPC.R.8 VPC.R.9 VPC.R.10: library part "Res 10k 1% 0805", "Chip resistor", Supplier Part Number 1=RMCF0805FT10K0TR-ND, PNP-A=0, PNP-da=0, PNP-dx=0, PNP-dy=0, PNP-FeedType=Tape, PNP-Level=1, PNP-Lv=1, PNP-Nzl=2, PNP-PlacePriority=1, PNP-Pt=0, PNP-TapeIndex=1, PNP-TapeWidth=8, PNP-Thk=0.55, PNP-TS=70, PNP-Type=chi, PNP-Voff=0, PNP-W=0, PNP-X=2.00, PNP-Y=1.25, Supplier 1=Digi-Key
MCU.U.1: "IC MCU 8BIT 32KB FLASH 44TQFP", Supplier Part Number 1=ATMEGA32U4RC-AU-ND, PNP-A=270, PNP-da=0, PNP-dx=0, PNP-dy=0, PNP-FeedType=Tray, PNP-Level=1.2, PNP-Lv=126, PNP-Nzl=6, PNP-PlacePriority=3, PNP-Pt=1, PNP-Thk=1.6, PNP-TS=70, PNP-Type=QFP, PNP-Voff=0, PNP-W=0.1, PNP-X=12, PNP-Y=12, Supplier 1=Digi-Key, Supplier 2=Mouser, Supplier 3=Arrow, Supplier Part Number 2=556-ATMEGA32U4RC-AU, Supplier Part Number 3=ATMEGA32U4RC-AU
MCU.Y.1: "8MHz ±20ppm Crystal 18pF 150 Ohms 4-SMD, No Lead", Supplier Part Number 1=1923-1256-ND, PNP-A=0, PNP-da=0, PNP-dx=0, PNP-dy=0, PNP-FeedType=Tape, PNP-Level=1, PNP-Lv=1, PNP-Nzl=4, PNP-PlacePriority=3, PNP-Pt=0, PNP-TapeIndex=2, PNP-TapeWidth=16, PNP-Thk=1.8, PNP-TS=70, PNP-Type=tr, PNP-Voff=0, PNP-W=0, PNP-X=8, PNP-Y=4.5, Supplier 1=Digi-Key, Supplier 2=Mouser, Supplier Part Number 2=449-LFXTAL055663BULK
MOS.R.3 MOS.R.4 USB.R.6 USB.R.7: library part "Res 22R 1% 0805", "Chip resistor", Supplier Part Number 1=RMCF0805FT22R0CT-ND, PNP-A=0, PNP-da=0, PNP-dx=0, PNP-dy=0, PNP-FeedType=Tape, PNP-Level=1, PNP-Lv=1, PNP-Nzl=2, PNP-PlacePriority=1, PNP-Pt=0, PNP-TapeIndex=1, PNP-TapeWidth=8, PNP-Thk=0.55, PNP-TS=70, PNP-Type=chi, PNP-Voff=0, PNP-W=0, PNP-X=2.00, PNP-Y=1.25, Supplier 1=Digi-Key, Supplier 2=Arrow, Supplier Part Number 2=RMCF0805FT22R0
MOS.U.2: "Optical Gaming Navigation Sensor", PNP-A=0, PNP-da=0, PNP-dx=0, PNP-dy=0, PNP-FeedType=Tape, PNP-Level=1.3, PNP-Lv=26, PNP-Nzl=4, PNP-PlacePriority=3, PNP-Pt=0, PNP-TapeIndex=2, PNP-TapeWidth=12, PNP-Thk=1.45, PNP-TS=70, PNP-Type=QFP, PNP-Voff=0, PNP-W=0.1, PNP-X=4.9, PNP-Y=3.9
REG.C.15: library part "Cap 100pF 100V", "0805, X5R or better", Supplier Part Number 1=1276-2426-1-ND, PNP-A=0, PNP-da=0, PNP-dx=0, PNP-dy=0, PNP-FeedType=Tape, PNP-Level=1, PNP-Lv=1, PNP-Nzl=2, PNP-PlacePriority=1, PNP-Pt=0, PNP-TapeIndex=1, PNP-TapeWidth=8, PNP-Thk=0.60, PNP-TS=70, PNP-Type=chi, PNP-Voff=0, PNP-W=0, PNP-X=2.00, PNP-Y=1.25, Supplier 1=Digi-Key, Supplier 2=Digi-Key, Supplier 3=Arrow, Supplier Part Number 2=1276-2426-2-ND, Supplier Part Number 3=L5XIfgkrxsBQF2sGZ85JNyFE59-nywaq7sHwLppiklbTEIlO4Ffw3x4_A6bjf4Mm
REG.U.3: "3.3V 150mA LDO regulator", Supplier Part Number 1=621-AP2202K-3.3TRG1, PNP-A=90, PNP-da=0, PNP-dx=0, PNP-dy=0, PNP-FeedType=Tape, PNP-Level=1, PNP-Lv=26, PNP-Nzl=2, PNP-PlacePriority=3, PNP-Pt=0, PNP-TapeIndex=1, PNP-TapeWidth=8, PNP-Thk=1, PNP-TS=90, PNP-Type=CHP, PNP-Voff=0, PNP-W=0, PNP-X=2.9, PNP-Y=1.3, Supplier 1=Mouser, Supplier 2=Digi-Key, Supplier 3=Arrow, Supplier Part Number 2=AP2202K-3.3TRG1DICT-ND, Supplier Part Number 3=PWagzdsTFFHKE_U17B45SP-NtndBrheJIaI5hB7gHD0ZVywxIBNyoAQstvnyfZZ0
REG.U.4: "Linear Voltage Regulator IC 1 Output 150mA SOT-23-5", Supplier Part Number 1=AP2204K-1.8TRG1DICT-ND, PNP-A=90, PNP-da=0, PNP-dx=0, PNP-dy=0, PNP-FeedType=Tape, PNP-Level=1, PNP-Lv=26, PNP-Nzl=2, PNP-PlacePriority=3, PNP-Pt=0, PNP-TapeIndex=1, PNP-TapeWidth=8, PNP-Thk=1, PNP-TS=90, PNP-Type=CHP, PNP-Voff=0, PNP-W=0, PNP-X=2.9, PNP-Y=1.3, Supplier 1=Digi-Key, Supplier 2=Mouser, Supplier Part Number 2=621-AP2204K-1.8TRG1
USB.FB.1 USB.FB.2 USB.FB.3: "FERRITE BEAD 600 OHM 0805 1LN", Supplier Part Number 1=535-12556-1-ND, PNP-A=0, PNP-da=0, PNP-dx=0, PNP-dy=0, PNP-FeedType=Tape, PNP-Level=1, PNP-Lv=1, PNP-Nzl=2, PNP-PlacePriority=1, PNP-Pt=0, PNP-TapeIndex=1, PNP-TapeWidth=8, PNP-Thk=0.55, PNP-TS=70, PNP-Type=chi, PNP-Voff=0, PNP-W=0, PNP-X=2.00, PNP-Y=1.25, Supplier 1=Digi-Key
USB.J.2: "USB - B USB 2.0 Receptacle Connector 4 Position Surface Mount, Right Angle", Supplier Part Number 1=A114945-ND, PNP-A=0, PNP-da=0, Supplier 1=Digi-Key, Supplier 2=Mouser, Supplier 3=Arrow, Supplier Part Number 2=571-1734346-1, Supplier Part Number 3=1734346-1
USB.R.13 USB.R.14 USB.R.15: library part "Res 0R 0805", "Chip resistor", Supplier Part Number 1=RMCF0805ZT0R00TR-ND, PNP-A=0, PNP-da=0, PNP-dx=0, PNP-dy=0, PNP-FeedType=Tape, PNP-Level=1, PNP-Lv=1, PNP-Nzl=2, PNP-PlacePriority=1, PNP-Pt=0, PNP-TapeIndex=1, PNP-TapeWidth=8, PNP-Thk=0.55, PNP-TS=70, PNP-Type=chi, PNP-Voff=0, PNP-W=0, PNP-X=2.00, PNP-Y=1.25, Supplier 1=Digi-Key
USB.Z.1: "TVS DIODE 5.5V 6TSOP (Low capacitance, USB)", PNP-A=270, PNP-da=0, PNP-dx=0, PNP-dy=0, PNP-FeedType=Tape, PNP-Level=1, PNP-Lv=26, PNP-Nzl=2, PNP-PlacePriority=3, PNP-Pt=0, PNP-TapeIndex=1, PNP-TapeWidth=8, PNP-Thk=1, PNP-TS=90, PNP-Type=CHP, PNP-Voff=0, PNP-W=0, PNP-X=2.9, PNP-Y=1.3
VPC.CJ.1 VPC.CJ.2 VPC.CJ.3 VPC.CJ.4 VPC.CJ.5 VPC.CJ.6 VPC.CJ.7 VPC.CJ.8 VPC.CJ.9: library part PCBJoint, "Pad for soldering a castellated PCB edge. Easy way to join two PCBs together.", PNP-A=0, PNP-da=0, PNP-dx=0, PNP-dy=0, PNP-FeedType=Tape, PNP-Level=1, PNP-Lv=1, PNP-Nzl=2, PNP-PlacePriority=1, PNP-Pt=0, PNP-TapeIndex=1, PNP-TapeWidth=8, PNP-Thk=1, PNP-TS=70, PNP-Type=CHI, PNP-Voff=0, PNP-W=0, PNP-X=1, PNP-Y=1
VPC.Z.2: "TVS DIODE 5.5V 6TSOP (Low capacitance, USB)", Supplier Part Number 1=1727-3578-1-ND, PNP-A=270, PNP-da=0, PNP-dx=0, PNP-dy=0, PNP-FeedType=Tape, PNP-Level=1, PNP-Lv=26, PNP-Nzl=2, PNP-PlacePriority=3, PNP-Pt=0, PNP-TapeIndex=1, PNP-TapeWidth=8, PNP-Thk=1, PNP-TS=90, PNP-Type=CHP, PNP-Voff=0, PNP-W=0, PNP-X=2.9, PNP-Y=1.3, Supplier 1=Digi-Key, Supplier 2=Mouser, Supplier 3=Arrow, Supplier Part Number 2=771-IP4220CZ6-T/R, Supplier Part Number 3=IP4220CZ6,125

## Free pads (board coordinates)
  round 0 hole 6: ""(7,-58.5) ""(29,-58.5)
  round 0 hole 17: ""(44.7,-46.359)

## Via types
v1: diameter 1, hole 0.5, Top Layer to Bottom Layer, tented both sides, 154 vias
v2: diameter 1.016, hole 0.508, Top Layer to Bottom Layer, 28 vias

## Nets (pads, with @x,y where several pads share a name; then routed paths per layer and width w, separated by ;. In a path a pad name is that pad's centre, name@x,y a point inside that pad or via, vN(x,y) a via of type N, cw(c..) or ccw(c..) an arc to the next point about the centre after c; other vN are vias at no path point)
1V8: MOS.R.3.2 MOS.U.2.4 REG.C.17.2 REG.C.18.2 REG.U.4.5 | length 14.5
  Top Layer w0.6: MOS.R.3.2 43.65,-19.102 45.598,-21.05 45.75,-21.05 ; MOS.U.2.4 44.4,-25.224 44.4,-22.4 45.75,-21.05 ; REG.U.4.5 REG.U.4.5@47.55,-19.076 ; REG.C.17.2 49.75,-19.102 49.724,-19.076 REG.U.4.5@47.55,-19.076 ; 45.75,-21.05 47.55,-19.25 REG.U.4.5@47.55,-19.076
3V3: MCU.C.5.2 MCU.C.6.2 MCU.C.7.2 MCU.C.8.2 MCU.C.9.2 MCU.R.1.2 MCU.U.1.14 MCU.U.1.24 MCU.U.1.34 MCU.U.1.44 MOS.R.5.2 MOS.U.2.5 REG.C.13.2 REG.C.14.2 REG.U.3.5 VPC.CJ.8.1 VPC.R.16.2 VPC.R.17.2 VPC.R.18.2 | length 84.2
  Top Layer w0.4: MCU.C.5.2 6.548,-32.95 MCU.U.1.24 ; v1(8.7,-42.1) 10.05,-42.1 MCU.U.1.34 ; MCU.U.1.14 16.45,-29.25 17.902,-27.798 MCU.C.6.2 ; MCU.U.1.44 18.05,-42.3 19.505,-42.3 v1@19.552,-42.348
  Top Layer w1: v1(4.5,-32.6) 4.552,-32.652 MCU.C.5.2 ; MCU.C.9.2 8.548,-42.252 v1(8.7,-42.1) ; VPC.CJ.8.1 16.4,-64.6 19.58,-61.42 19.58,-47.495 20.098,-46.977 VPC.R.16.2 20.098,-44.745 19.552,-44.2 MCU.C.8.2 19.552,-42.348 v1(19.6,-42.3) 20.098,-41.802 22.098,-41.802 VPC.R.17.2 ; MCU.C.6.2 17.902,-25.85 MCU.C.7.2@17.955,-25.798 ; v1(19.1,-24.3) 19.1,-24.652 MCU.C.7.2@17.955,-25.798 ; MOS.R.5.2 21.45,-25.798 MCU.R.1.2 MCU.C.7.2@17.955,-25.798 ; REG.U.3.5 23.602,-19.55 23.65,-19.502 REG.C.14.2 ; v1(23.9,-20.8) REG.C.14.2 ; v1(25.8,-20.8) REG.C.13.2@25.8,-19.502 ; REG.C.13.2 REG.C.13.2@25.8,-19.502 ; VPC.R.18.2 29.25,-44.698 29.25,-43.45 v1(29.3,-43.4) ; REG.C.14.2 REG.C.13.2@25.8,-19.502
  Plane 1 w1: v1(19.1,-24.3) 19.9,-23.5 45.4,-23.5 46.141,-24.241 46.141,-25.187 MOS.U.2.5
C\S\: MCU.U.1.8 MOS.U.2.13 | length 27.9
  Top Layer w0.4: MCU.U.1.8 21.049,-34.55 21.419,-34.18 22.48,-34.18 22.85,-34.55 27.15,-34.55 30.3,-37.7 40.6,-37.7 41.283,-37.017 41.311,-37.045 43.955,-37.045 45.075,-35.925 MOS.U.2.13
GND: LBS.C.20.1 LBS.C.21.1 LBS.SW.1.A LBS.SW.2.A MCH.SP.1.1 MCH.SP.2.1 MCH.SP.3.1 MCH.SP.4.1 MCH.SP.5.1 MCH.SP.6.1 MCH.SP.7.1 MCH.SP.8.1 MCH.SP.9.1 MCH.SP.10.1 MCH.SP.11.1 MCH.SP.12.1 MCH.SP.13.1 MCH.SP.14.1 MCH.SP.15.1 MCH.SP.16.1 MCH.SP.17.1 MCH.SP.18.1 MCH.SP.19.1 MCH.SP.20.1 MCH.SP.21.1 MCH.SP.22.1 MCH.SP.23.1 MCH.SP.24.1 MCH.SP.25.1 MCH.SP.26.1 MCH.SP.27.1 MCH.SP.28.1 MCU.C.1.1 MCU.C.2.1 MCU.C.3.1 MCU.C.4.1 MCU.C.5.1 MCU.C.6.1 MCU.C.7.1 MCU.C.8.1 MCU.C.9.1 MCU.C.22.1 MCU.D.1.2 MCU.J.1.6 MCU.U.1.5 MCU.U.1.12 MCU.U.1.15 MCU.U.1.18 MCU.U.1.21 MCU.U.1.23 MCU.U.1.26 MCU.U.1.28 MCU.U.1.30 MCU.U.1.31 MCU.U.1.32 MCU.U.1.33 MCU.U.1.35 MCU.U.1.37 MCU.U.1.38 MCU.U.1.40 MCU.U.1.43 MCU.Y.1.2 MCU.Y.1.4 MOS.C.10.1 MOS.C.11.1 MOS.U.2.8 REG.C.12.1 REG.C.13.1 REG.C.14.1 REG.C.15.1 REG.C.16.1 REG.C.17.1 REG.C.18.1 REG.U.3.2 REG.U.4.2 USB.C.19.1 USB.R.13.1 USB.R.14.1 USB.R.15.1 USB.Z.1.2 VPC.CJ.1.1 VPC.CJ.5.1 VPC.CJ.9.1 VPC.Z.2.2 | length 26.1
  Top Layer w0.4: v1(11.2,-26.8) 11.8,-26.8 13.25,-28.25 MCU.U.1.18 ; MCU.U.1.15 15.65,-27.848 MCU.C.6.1 ; MCU.U.1.43 17.25,-43.652 MCU.C.8.1 ; MCU.U.1.5 23.098,-36.95 23.7,-37.552 MCU.C.1.1
  Top Layer w0.6: MCU.C.2.1 8.1,-22.1 9.9,-22.1 MCU.Y.1.2 ; MCU.Y.1.4 14.25,-24.95 15.698,-26.398 15.698,-27.4 MCU.C.6.1 ; REG.C.12.1 20.698,-15.25 21.1,-15.652 REG.U.3.2 ; REG.C.16.1 46.298,-14.75 46.6,-15.052 REG.U.4.2
  Top Layer w1: MCU.C.8.1 17.548,-44.2 18.752,-45.405 MCU.C.4.1
  other v1: 10,-64.5 46.5,-64.5 1.5,-64 10.5,-62.5 14,-62.5 26.5,-62.5 30.5,-62.5 46.5,-62.5 22.5,-62 43,-62 12,-61.5 18,-61 41.2,-60.4 45.3,-60.4 49.4,-60.4 1.5,-59 33,-59 37.5,-58.4 13.5,-57 25.5,-56.5 43.1,-56.2 47.5,-56 34.8,-55.6 39,-54.5 1.5,-54 17,-54 51.2,-53.9 32.1,-52.8 8,-52.5 36,-51.6 23,-51.5 26,-51 53.9,-50.3 21,-50 14,-49.5 1.5,-49 31.5,-48.9 67.9,-48.6 7.5,-48 18,-47.5 34.8,-47.5 66.1,-47.5 12.5,-46 15.5,-46 25.6,-46 54.7,-45.8 66.8,-45.6 31.5,-44.5 1.5,-44 35.1,-43.4 68,-43 58.1,-41.6 53.1,-41 28.2,-40.8 36.9,-40 76,-40 17.2,-39.9 32.8,-39.5 14.1,-39.4 1.5,-39 5,-39 10.9,-39 69,-38 28.8,-37.9 25.5,-37.5 17.4,-36.9 74.4,-36.3 59.7,-36.2 64,-36 14.5,-35.5 10.9,-35.4 56,-35 1.5,-34 62.3,-33.7 60.5,-32.7 10.6,-32.6 17.7,-32.5 33.5,-32.5 14.4,-32.3 74,-32 61.2,-30.9 20,-30 1.5,-29 5.5,-29 30.5,-28.5 56,-28.5 33.5,-25.5 8.2,-25.2 63,-25 1.5,-24 15.9,-23.8 6.8,-22.8 31,-21.5 50,-21.5 56,-21.5 15.9,-21.1 36.5,-21 44,-21 8.8,-20.7 11.4,-19.6 13.8,-19.1 1.5,-19 5.5,-18.5 53.5,-18.5 21.1,-18.3 46.6,-17.7 37.9,-16.8 18.5,-16.5 24,-16 27,-16 32.5,-16 50.4,-15.9 40.4,-15.5 1.5,-14 32.5,-11.5 50.5,-11.5 15.5,-11 25.5,-9 6.5,-8.4 20,-7.5 30.5,-7 37,-6.5 47.5,-6 25,-4.5
  other v2: 3.6,-66.4 9,-66.4 47,-66.4 51,-65.7 52,-61.7 52.5,-57.8 68.7,-56.2 55.1,-55.1 63.1,-54.3 58.7,-53.5 71.9,-52.1 73.8,-47.2 68.5,-27.6 72.4,-25.1 70.5,-20.8 65.5,-19.7 59.9,-19.4 56.1,-15.4 1.7,-8.6 56.5,-8 3.2,-4.9 52,-3.5 6.8,-2.2 44.8,-1.8 15.6,-1.6 22.4,-1.6 28.4,-1.6 34.1,-1.6
MISO: MCU.J.1.1 MCU.U.1.11 MOS.R.5.1 MOS.U.2.12 | length 39.5
  Top Layer w0.3: MOS.R.5.1 22.802,-27.802 23.341,-28.341 28.841,-28.341 29.459,-28.959 29.459,-30.881 MCU.J.1.1
  Top Layer w0.4: MCU.U.1.11 21.15,-32.15 21.7,-31.6 MOS.R.5.1
  Plane 2 w0.4: v1(37.95,-36) 38.1,-36 39.4,-37.3 45.793,-37.3 47.068,-36.025 MOS.U.2.12
  Plane 1 w0.4: MCU.J.1.1 32.06,-36 v1(37.95,-36)
MOSI: MCU.J.1.4 MCU.U.1.10 MOS.U.2.11 | length 38.8
  Top Layer w0.4: MCU.U.1.10 21.85,-32.95 24.936,-29.864 25.396,-29.864 MCU.J.1.4
  Plane 1 w0.4: MCU.J.1.4 25.287,-29.6 24.1,-30.787 24.1,-33.1 24.9,-33.9 28.97,-33.9 32.509,-37.439 47.432,-37.439 48.846,-36.025 MOS.U.2.11
NetLBS.C.20_2: LBS.C.20.2 LBS.R.11.2 MCU.U.1.29 | length 34.2
  Top Layer w0.4: MCU.U.1.29 6.672,-36.95 2.88,-33.158 2.88,-22.943 4.412,-21.412 4.412,-16.43 6.641,-14.2 8.848,-14.2 10.398,-15.75 LBS.R.11.2
  Top Layer w1: LBS.C.20.2 LBS.R.11.2
NetLBS.C.21_2: LBS.C.21.2 LBS.R.12.2 MCU.U.1.27 | length 25.2
  Top Layer w0.4: LBS.C.21.2 7.602,-19.098 3.5,-23.2 3.5,-32.901 5.949,-35.35 MCU.U.1.27
  Top Layer w1: LBS.R.12.2 7.602,-15.202 LBS.C.21.2
NetLBS.R.11_1: LBS.R.11.1 LBS.SW.1.B | length 30.4
  Top Layer w0.4: LBS.R.11.1 15.902,-12.5 40.1,-12.5 LBS.SW.1.B
NetLBS.R.12_1: LBS.R.12.1 LBS.SW.2.B | length 4.8
  Top Layer w1: LBS.R.12.1 7.85,-13.198 8.548,-12.5 11.1,-12.5 LBS.SW.2.B
NetMCU.C.1_2: MCU.C.1.2 MCU.U.1.6 | length 4.4
  Top Layer w0.4: MCU.U.1.6 23.098,-36.15 23.7,-35.548 MCU.C.1.2
NetMCU.C.2_2: MCU.C.2.2 MCU.U.1.17 MCU.Y.1.3 | length 10.2
  Top Layer w0.4: MCU.C.2.2 8.05,-23.675 8.532,-23.675 9.807,-24.95 MCU.Y.1.3 10.401,-25.401 11.401,-25.401 14.05,-28.05 MCU.U.1.17
NetMCU.C.3_2: MCU.C.3.2 MCU.U.1.16 MCU.Y.1.1 | length 11.3
  Top Layer w0.4: MCU.C.3.2 14.4,-22.6 12.93,-24.07 12.93,-26.053 14.85,-27.973 MCU.U.1.16
NetMCU.C.4_2: MCU.C.4.2 MCU.U.1.42 | length 4.2
  Top Layer w0.4: MCU.U.1.42 16.45,-45.652 MCU.C.4.2
NetMCU.D.1_1: MCU.D.1.1 MCU.R.2.1 | length 3.2
  Top Layer w1: MCU.D.1.1 6.3,-46.55 6.6,-46.25 8.598,-46.25 MCU.R.2.1
NetMCU.R.2_2: MCU.R.2.2 MCU.U.1.36 | length 4.5
  Top Layer w0.4: MCU.R.2.2 10.602,-45.75 11.65,-44.702 MCU.U.1.36
NetMCU.U.1_1: MCU.U.1.1 VPC.R.10.2 | length 13.1
  Top Layer w0.4: MCU.U.1.1 20.35,-40.15 20.73,-40.53 22.684,-40.53 23.1,-40.946 23.1,-44.5 22.6,-45 21.6,-45 21.1,-45.5 21.1,-47.801 21.399,-48.1 21.898,-48.1 VPC.R.10.2
NetMCU.U.1_3: MCU.U.1.3 USB.R.6.2 | length 60.2
  Top Layer w0.4: MCU.U.1.3 22.315,-38.55 24.265,-40.5 v1(26,-40.5)
  Top Layer w0.5: v1(61,-50.9) USB.R.6.2
  Plane 1 w0.5: v1(26,-40.5) 26.7,-39.8 30.1,-39.8 32.6,-42.3 32.6,-51.3 40,-58.7 49.631,-58.7 57.431,-50.9 v1(61,-50.9)
NetMCU.U.1_4: MCU.U.1.4 USB.R.7.2 | length 56
  Top Layer w0.4: MCU.U.1.4 22.391,-37.75 23.641,-39 v1(25.3,-39)
  Top Layer w0.5: v1(56.6,-49.9) 56.652,-49.952 58.05,-49.952 USB.R.7.2
  Plane 1 w0.5: v1(25.3,-39) 30.431,-39 33.4,-41.969 33.4,-50.969 40.331,-57.9 49.3,-57.9 56.6,-50.6 v1(56.6,-49.9)
NetMCU.U.1_19: MCU.U.1.19 MOS.U.2.9 | length 61.8
  Top Layer w0.4: v1(11.883,-28.32) 11.963,-28.4 12,-28.4 12.45,-28.85 MCU.U.1.19 ; v1(20.7,-22) v1(28.1,-22)
  Bottom Layer w0.4: v1(11.883,-28.32) 13.213,-28.32 19.533,-22 v1(20.7,-22)
  Bottom Layer w0.5: v1(28.1,-22) 29.23,-23.13 53.03,-23.13 54.6,-24.7 54.6,-35.2 53.875,-35.925 MOS.U.2.9
NetMCU.U.1_20: MCU.U.1.20 VPC.R.8.2 | length 42.5
  Top Layer w0.4: v1(10.062,-27.8) 11.65,-29.388 MCU.U.1.20 ; v1(29.2,-49.8) 29.202,-49.798 VPC.R.8.2 VPC.R.8.2@29.502,-48
  Bottom Layer w0.4: v1(10.062,-27.8) 10.062,-29.138 9.5,-29.7 9.5,-36.101 14.699,-41.3 17.38,-41.3 17.92,-40.76 20.238,-40.76 21.518,-42.04 26.541,-42.04 29.2,-44.699 v1(29.2,-49.8)
NetMCU.U.1_25: MCU.U.1.25 VPC.R.9.2 | length 27.1
  Top Layer w0.4: v1(6.3,-34.1) 6.65,-33.75 MCU.U.1.25 ; v1(20.8,-43.7) v1@20.8,-43.538 ; v1@21.034,-43.6 21.134,-43.7 VPC.R.9.2
  Bottom Layer w0.5: v1(6.3,-34.1) 6.3,-41.9 8.9,-44.5 20,-44.5 v1(20.8,-43.7)
NetMCU.U.1_39: MCU.U.1.39 VPC.CJ.4.1 VPC.Z.2.6 | length 42.3
  Top Layer w0.4: MCU.U.1.39 14.05,-43.45 v1(14.1,-43.5) ; VPC.Z.2.6 27.05,-43.95 v1(27.1,-43.9)
  Bottom Layer w0.4: v1(14.1,-43.5) 16.062,-43.5 18.182,-41.38 19.981,-41.38 21.261,-42.66 25.86,-42.66 v1(27.1,-43.9)
  Bottom Layer w0.6: v1(27.1,-43.9) 27.1,-50.4 34.1,-57.4 34.1,-62.35 32.4,-64.05 VPC.CJ.4.1
NetMCU.U.1_41: MCU.U.1.41 VPC.CJ.3.1 VPC.Z.2.5 | length 46.8
  Top Layer w0.4: v1(15.6,-39.7) 15.65,-39.75 MCU.U.1.41 ; VPC.Z.2.5 27.125,-45.925 27.775,-45.925 28,-45.7 v1(30.4,-45.7) 30.4,-53 36.4,-59 VPC.CJ.3.1
  Bottom Layer w0.4: v1(15.6,-39.7) 15.716,-39.7 16.436,-38.98 19.879,-38.98 22.319,-41.42 26.798,-41.42 27.778,-42.4 29.8,-42.4 30.4,-43 v1(30.4,-45.7)
NetMOS.C.10_2: MOS.C.10.2 MOS.C.11.2 MOS.U.2.3 | length 9.2
  Top Layer w0.7: MOS.C.11.2 MOS.C.10.2 41.65,-18.802 41.8,-18.952 41.8,-20 42.6,-20.8 42.6,-25.202 MOS.U.2.3 MOS.U.2.3@42.711,-25.137
NetMOS.R.3_1: MOS.R.3.1 MOS.R.4.2 | length 1.5
  Top Layer w1: MOS.R.3.1 MOS.R.4.2
NetMOS.R.4_1: MOS.R.4.1 MOS.U.2.15 | length 35.8
  Top Layer w0.4: MOS.U.2.15 41.498,-35.925 40.378,-37.045 36.7,-37.045 35,-35.345 35,-20.7 36.9,-18.8 36.9,-15.5 38.802,-13.598 MOS.R.4.1
NetREG.C.15_2: REG.C.15.2 REG.U.3.4 | length 2.1
  Top Layer w1: REG.C.15.2 19.498,-20.202 REG.U.3.4
NetUSB.FB.1_1: USB.FB.1.1 USB.J.2.1 USB.Z.1.4 USB.Z.1.5 | length 8.9
  Top Layer w0.6: USB.FB.1.1 57.85,-38.302 58.05,-38.502 58.05,-38.752 58.575,-39.277 58.575,-40.15 USB.Z.1.4 59.05,-39.55 60.551,-38.049 63.832,-38.049 USB.J.2.1
NetUSB.FB.2_1: USB.FB.2.1 USB.J.2.2 USB.Z.1.3 | length 8.5
  Top Layer w0.5: USB.Z.1.3@59.05,-42.725 USB.Z.1.3 59.05,-43.198 59.075,-43.223 60.075,-43.223 60.75,-43.898 USB.FB.2.1 61.25,-43.898 62.7,-42.448 62.7,-41.1 USB.J.2.2
NetUSB.FB.2_2: USB.FB.2.2 USB.R.6.1 | length 1.4
  Top Layer w0.5: USB.R.6.1 USB.FB.2.2
NetUSB.FB.3_1: USB.FB.3.1 USB.J.2.3 USB.Z.1.1 | length 10.7
  Top Layer w0.5: USB.Z.1.1 57.175,-43.075 57.175,-44.023 58.05,-44.898 USB.FB.3.1 58.33,-44.868 61.857,-44.868 65.139,-41.586 USB.J.2.3
NetUSB.FB.3_2: USB.FB.3.2 USB.R.7.1 | length 1.3
  Top Layer w0.5: USB.R.7.1 USB.FB.3.2
NetUSB.J.2_4: USB.J.2.4 USB.R.13.2 | length 3.5
  Top Layer w0.65: USB.R.13.2 62,-40 USB.J.2.4
NetUSB.J.2_5: USB.J.2.5 USB.R.14.2 USB.R.15.2 | length 25.8
  Top Layer w1.5: USB.R.15.2 69.809,-31.669 72.503,-34.363 72.503,-37.203 74.3,-39 74.3,-42.861 72.981,-44.18 71.659,-44.18 69.37,-46.469 USB.R.14.2
NetVPC.CJ.2_1: VPC.CJ.2.1 VPC.R.8.1 VPC.R.18.1 VPC.Z.2.4 | length 27.8
  Top Layer w0.55: VPC.Z.2.4 VPC.Z.2.4@27.124,-46.95 ; VPC.R.18.1 28.75,-46.702 28.502,-46.95 VPC.Z.2.4@27.124,-46.95 ; v1(35.3,-61.4) 35.3,-58.883 27.198,-50.78 VPC.R.8.1 27.124,-48.226 VPC.Z.2.4@27.124,-46.95
  Bottom Layer w0.55: v1(35.3,-61.4) 39.3,-61.4 40.4,-62.5 VPC.CJ.2.1
NetVPC.CJ.6_1: VPC.CJ.6.1 VPC.R.9.1 VPC.R.17.1 VPC.Z.2.1 | length 26.3
  Top Layer w0.55: VPC.R.17.1 VPC.R.9.1 ; VPC.Z.2.1 24.126,-45.05 24.126,-43.724 VPC.R.9.1 ; v1(25.4,-43.7) VPC.R.9.1
  Bottom Layer w0.55: VPC.CJ.6.1 24.4,-44.7 v1(25.4,-43.7)
NetVPC.CJ.7_1: VPC.CJ.7.1 VPC.R.10.1 VPC.R.16.1 VPC.Z.2.3 | length 21.9
  Top Layer w0.5: VPC.CJ.7.1 20.55,-64.75 20.55,-52.102 24.102,-48.55 VPC.R.10.1 24.126,-48.276 24.126,-46.974 VPC.Z.2.3 24.125,-46.925 23.125,-46.925 22.9,-46.7 22.352,-46.7 22.102,-46.45 VPC.R.16.1
R\E\S\E\T\: MCU.C.22.2 MCU.J.1.5 MCU.R.1.1 MCU.U.1.13 MOS.U.2.7 | length 42
  Top Layer w0.4: MCU.U.1.13 17.25,-29.45 17.9,-28.8 18.7,-28.8 18.822,-28.678 18.825,-28.678 MCU.R.1.1 19.95,-27.802 20.53,-27.222 20.53,-27.216 20.988,-26.758 22.842,-26.758 24.35,-25.25 24.35,-23.95 25.2,-23.1 26.852,-23.1 28.002,-24.25 MCU.C.22.2 28.101,-24.599 28.101,-26.961 MCU.J.1.5
  Bottom Layer w0.4: MCU.J.1.5 31.46,-23.8 48.41,-23.8 49.735,-25.125 MOS.U.2.7
SCLK: MCU.J.1.3 MCU.U.1.9 MOS.U.2.10 | length 36.4
  Top Layer w0.3: MCU.U.1.9 20.95,-33.75 21.1,-33.6 22.006,-33.6 24.725,-30.881 26.919,-30.881 MCU.J.1.3
  Bottom Layer w0.4: MCU.J.1.3 28.6,-29.6 36.4,-37.4 49.249,-37.4 50.624,-36.025 MOS.U.2.10
V_USB: MCU.J.1.2 MCU.U.1.2 MCU.U.1.7 REG.C.12.2 REG.C.16.2 REG.U.3.1 REG.U.3.3 REG.U.4.1 REG.U.4.3 USB.C.19.2 USB.FB.1.2 | length 109.9
  Top Layer w0.4: MCU.U.1.2 21.388,-39.35 21.638,-39.6 v1(21.8,-39.6) ; MCU.U.1.7 21.566,-35.35 21.8,-35.116 v1(21.8,-35.1)
  Top Layer w0.6: REG.U.3.3 20.15,-16.65 19.6,-16.1 19.6,-14.1 20.1,-13.6 23.852,-13.6 ; REG.U.3.1 22.05,-15.902 22.702,-15.25 REG.C.12.2 ; REG.U.4.3 45.65,-16.15 45,-15.5 45,-13.5 45.4,-13.1 47.9,-13.1 48.3,-13.5 48.3,-14.502 48.102,-14.7 48.102,-15.598 47.55,-16.15 REG.U.4.1
  Top Layer w0.8: USB.FB.1.2 USB.FB.1.2@57.649,-36.249
  Top Layer w1: REG.C.12.2 22.702,-14.75 23.852,-13.6 v1(24.4,-13.6) ; REG.C.16.2 48.302,-14.6 v1(49.851,-14.6) 51.4,-14.6 57.698,-20.898 USB.C.19.2 57.698,-36.298 USB.FB.1.2
  Bottom Layer w1: v1(21.8,-39.6) v1(21.8,-35.1) 22.7,-35.1 MCU.J.1.2 23.7,-30.18 23.7,-25.2 22.5,-24 22.5,-15.452 24.352,-13.6 v1(24.4,-13.6) 33.1,-13.6 33.6,-14.1 49.351,-14.1 v1(49.851,-14.6)
pads on no net: LBS.SW.1. LBS.SW.2. MCH.FID.1.1 MCH.FID.2.1 MCU.U.1.22 MOS.U.2. MOS.U.2.1 MOS.U.2.2 MOS.U.2.6 MOS.U.2.14 MOS.U.2.16 REG.U.4.4 USB.J.2. USB.Z.1.6

## Polygon pours and split planes (outlines as drawn)
GND on Plane 1 "Plane 1-GND" (solid, remove dead copper, pour order 16): -1,0 81,0 81,-68 -1,-68
3V3 on Plane 1 "Plane 1-3V3" (solid, pour order 0): 28.018,-20.982 28.018,-23.982 27,-25 24,-25 23,-26 23,-34 30.37,-41.37 30.37,-45.63 28.3,-47.7 8.7,-47.7 3,-42 3,-29.5 13.5,-19 26.035,-19
GND on Top Layer "Top Layer-GND" (solid, remove dead copper, pour order 12): -1,0 81,0 81,-68 -1,-68
no net on Top Layer "Top Layer-No Net" (solid, pour order 18): 13.348,21.85
3V3 on Top Layer "Top Layer-3V3" (solid, pour order 10): 18.5,20.5
GND on Plane 2 "Plane 2-GND" (solid, remove dead copper, pour order 2): -1,0 81,0 81,-68 -1,-68
GND on Bottom Layer "Bottom Layer-GND" (solid, remove dead copper, pour order 14): -1,0 81,0 81,-68 -1,-68

## Silkscreen, mask and mechanical layers (free items; w line width, h text height)
Top Overlay:
  text "L1.004" at 56.9,-22.7 h2.4
  text "Licensed under the / CERN OHL v. 1.2 / Copyright Ploopy  / 2019" at 56.9,-28.4 h1.6
Mechanical 1:
  lines w0.1: 36.26,-34.868 53.52,-34.868 53.52,-26.268 36.26,-26.268 36.26,-34.868
Board Outline:
  drawing of 349 lines, arcs and shapes, not listed

## Text inside footprints (layer, text, board x,y; h text height)
MOS.U.2: Top Overlay "Optic Side" at 34,-34.95 h2 r90; Bottom Overlay "Sensor Side" at 54.217,-35.025 h2 r270; Bottom Overlay "1" at 34.3,-25.25 h4